# Altium PCB PCB1.PcbDoc
Units mil, origin at the board's own origin, x right, y up, seen from the top; angles counter-clockwise.
Board outline 4450 x 6145 mil, 4 copper layers (Top Layer, GND1, Layer GND2, Bottom Layer), stack 23.756 mil thick; 119 components, 83 nets, 374 pads, 54 vias.
Unrouted connection lines stored in the file: 6.
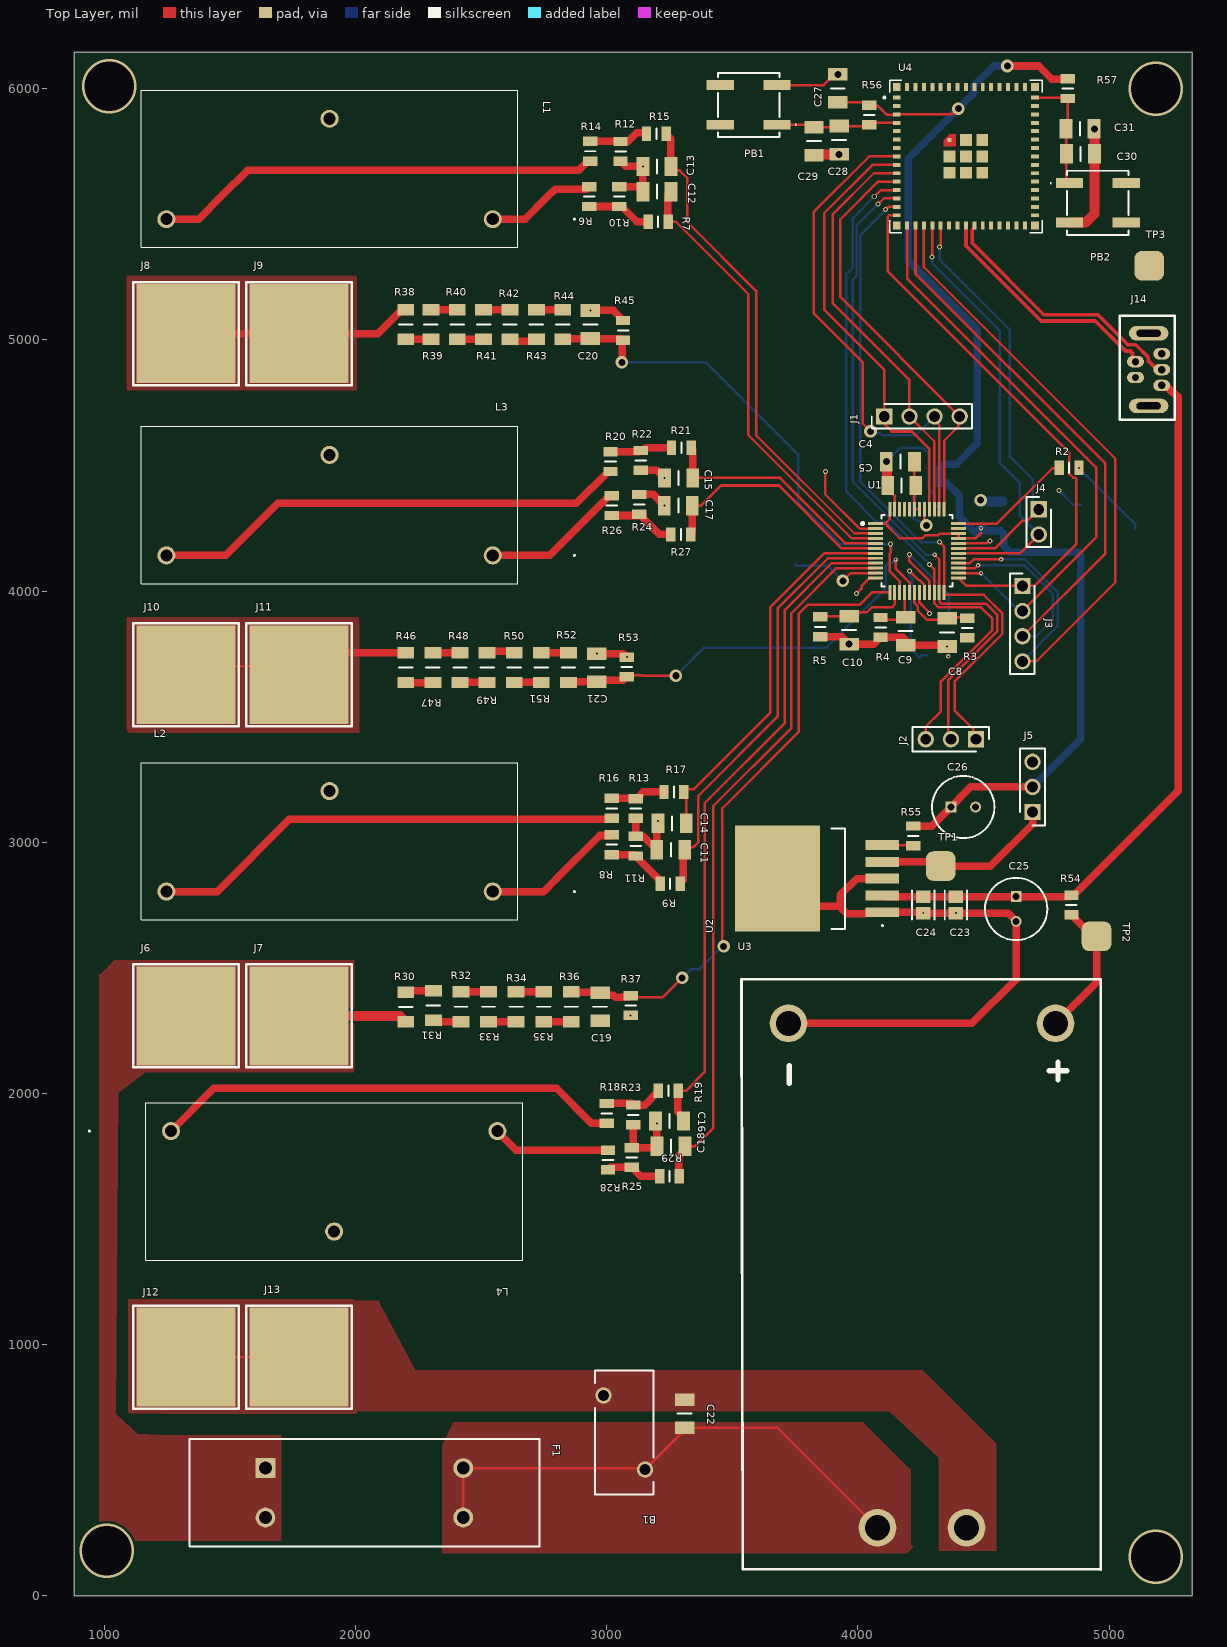
[diagram p0: Top Layer view]
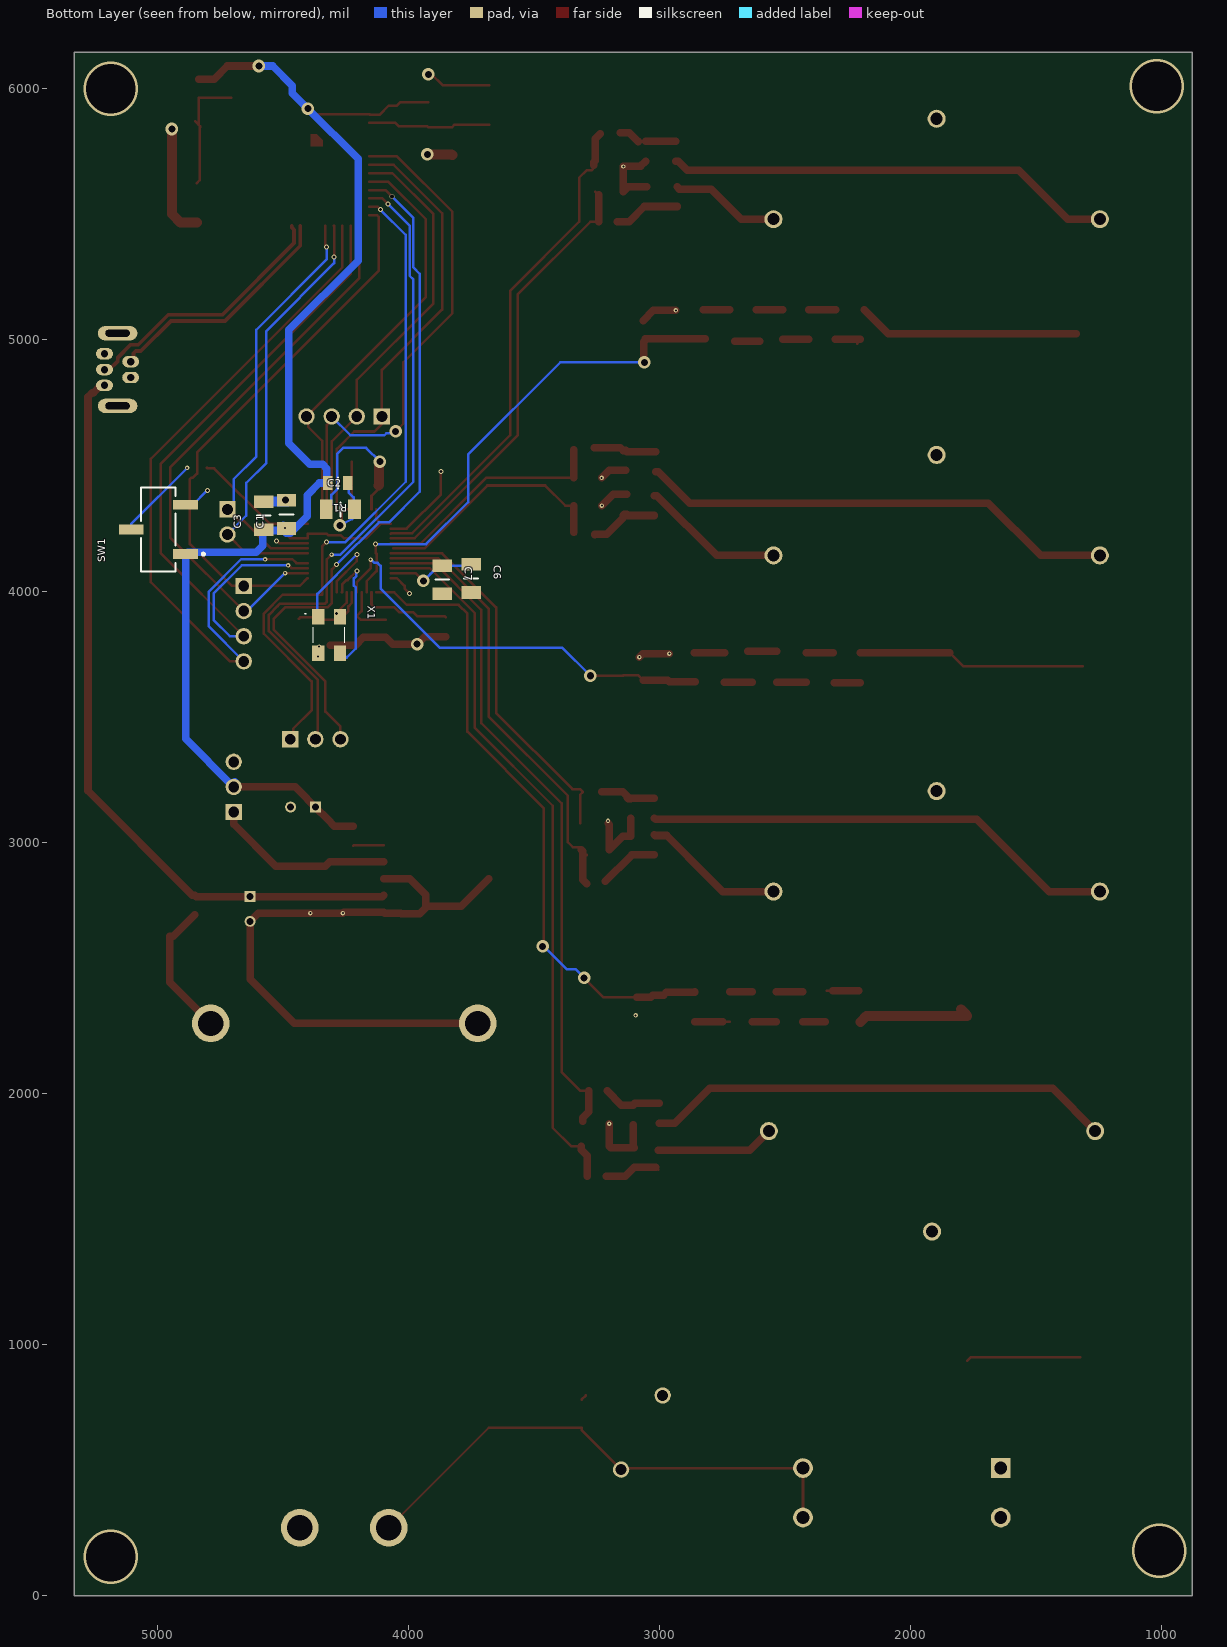
[diagram p1: Bottom Layer view, seen from below]
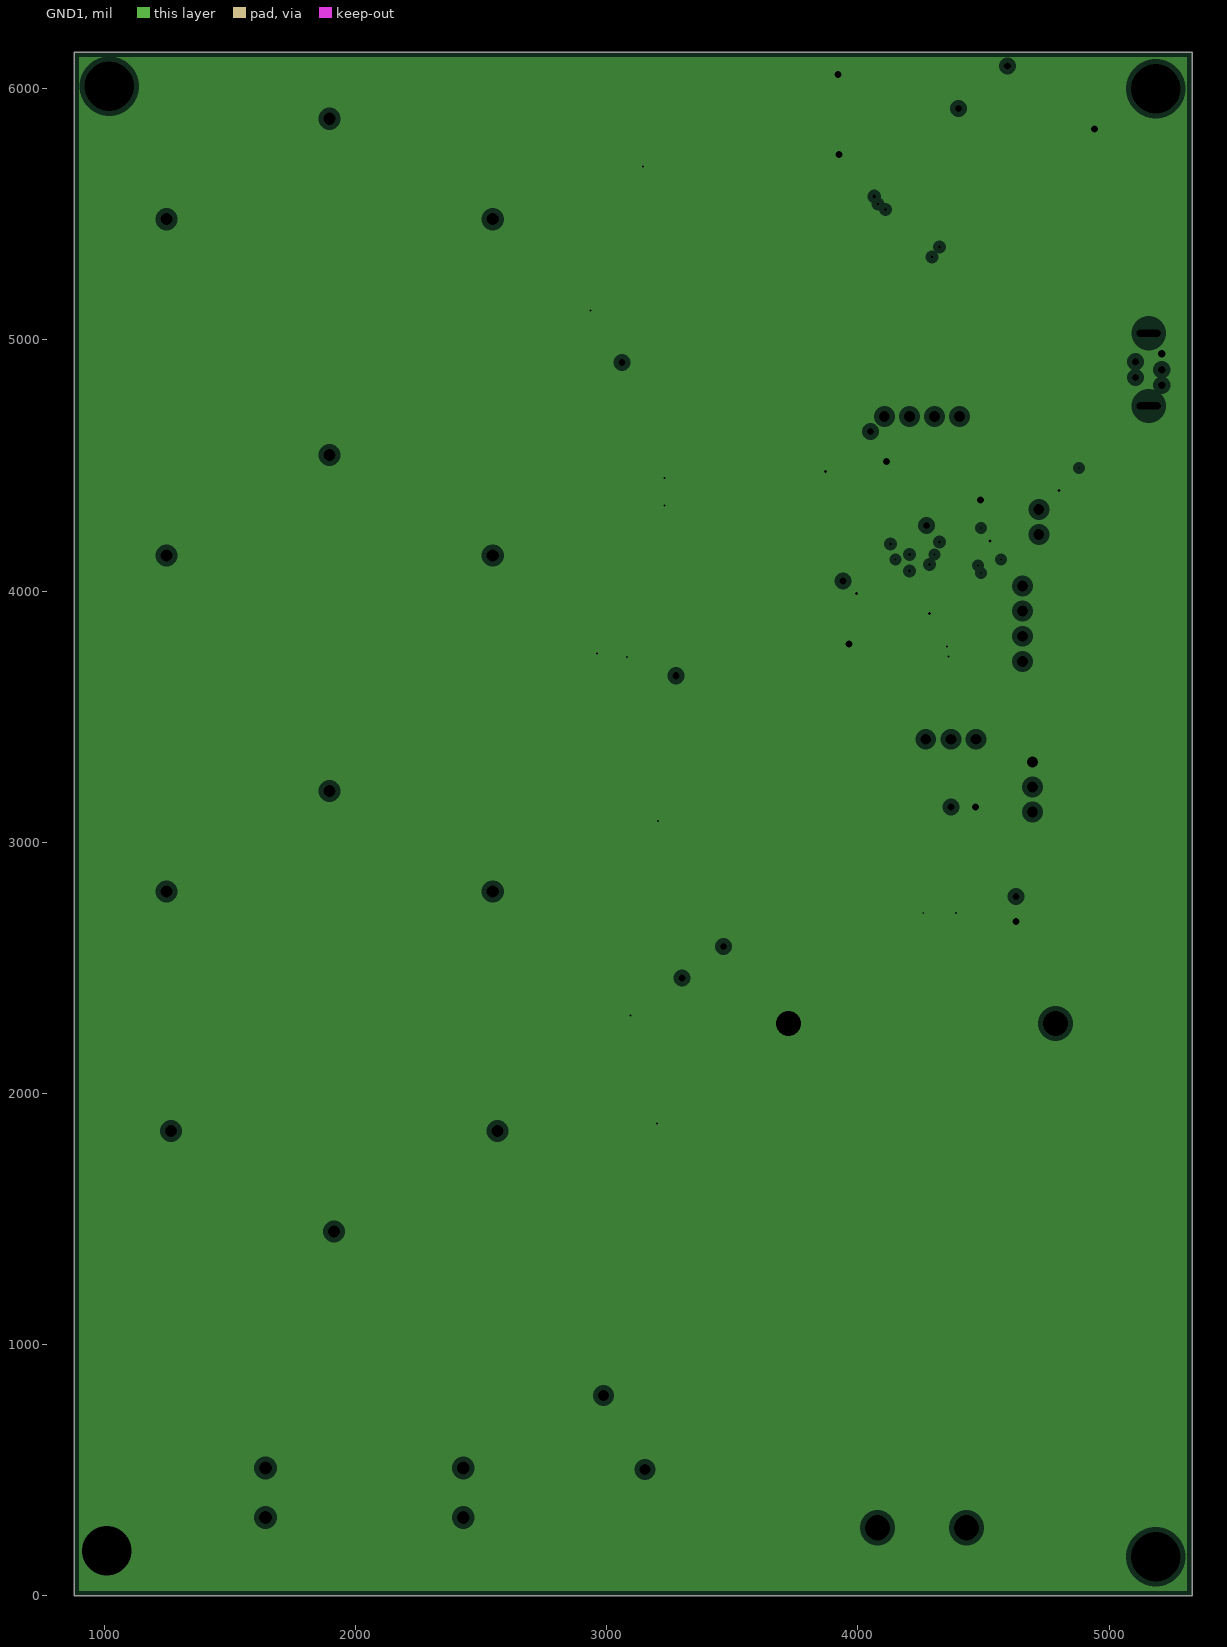
[diagram p2: GND1, clearances drawn from the general rule]
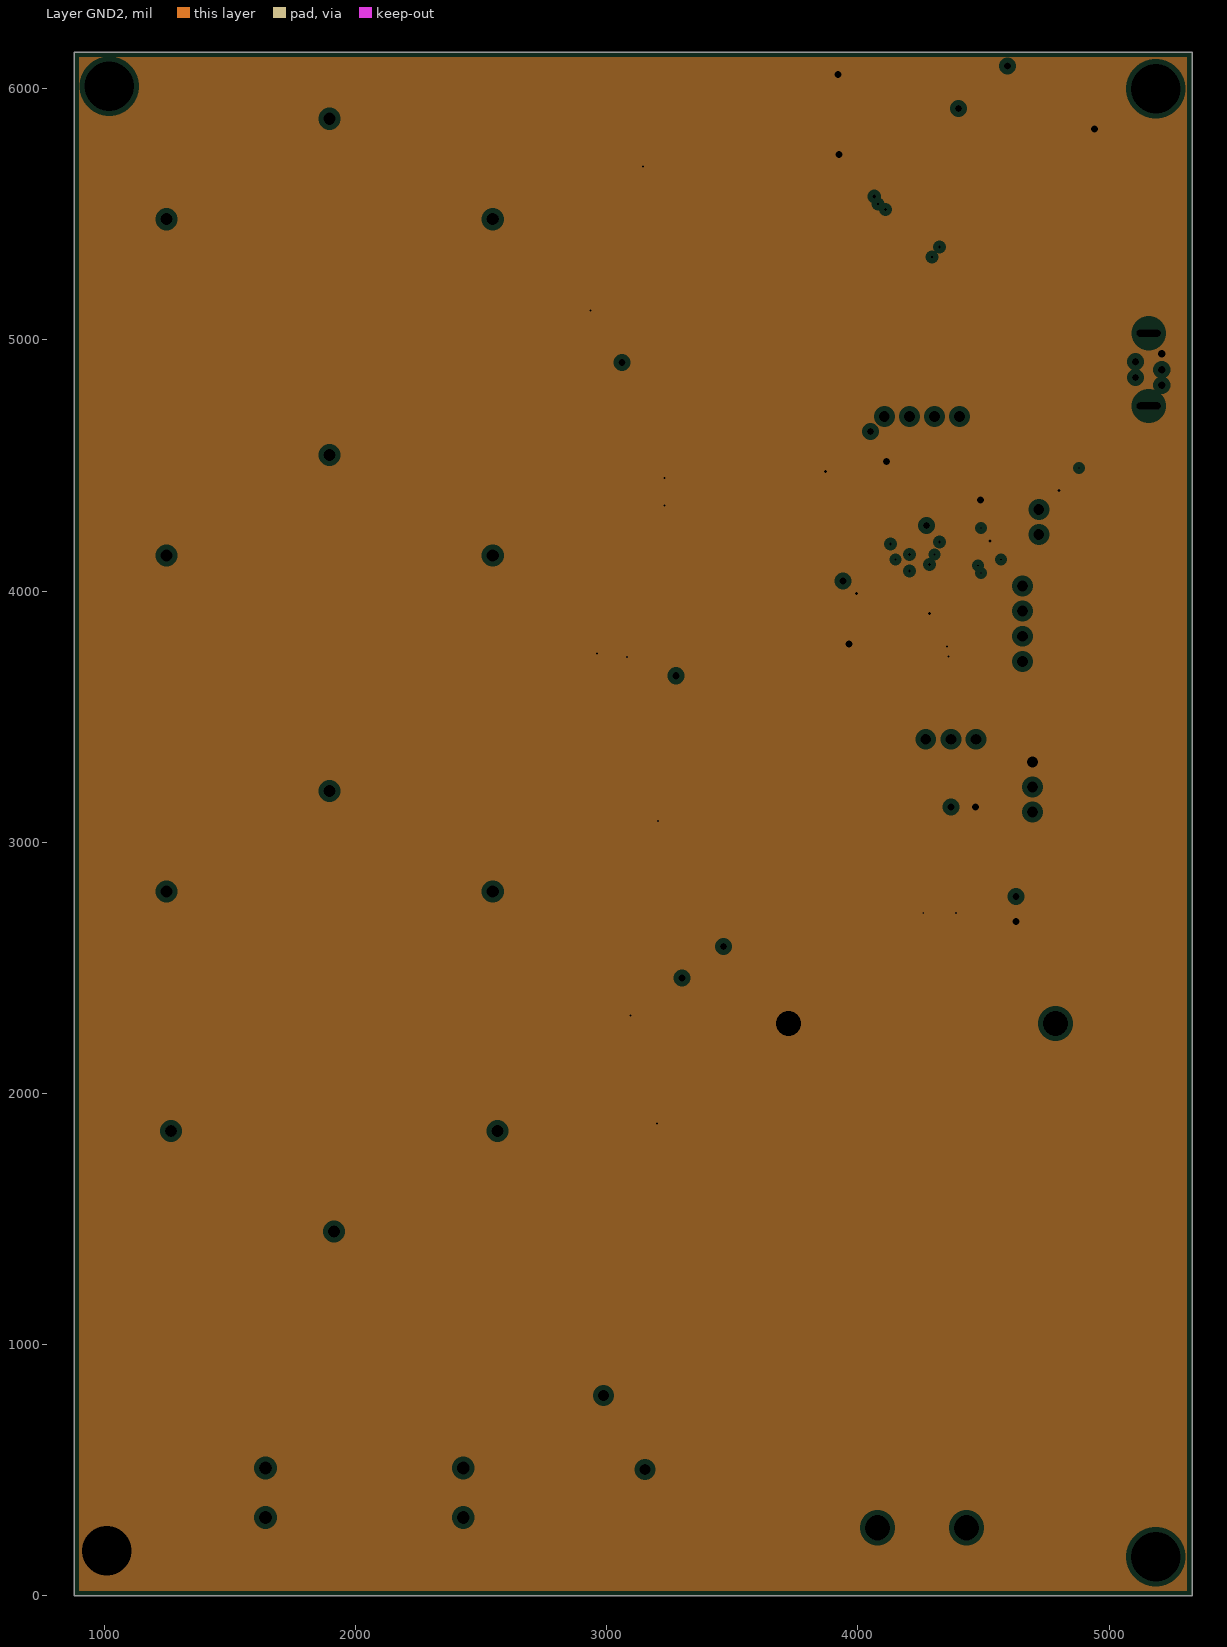
[diagram p3: Layer GND2, clearances drawn from the general rule]
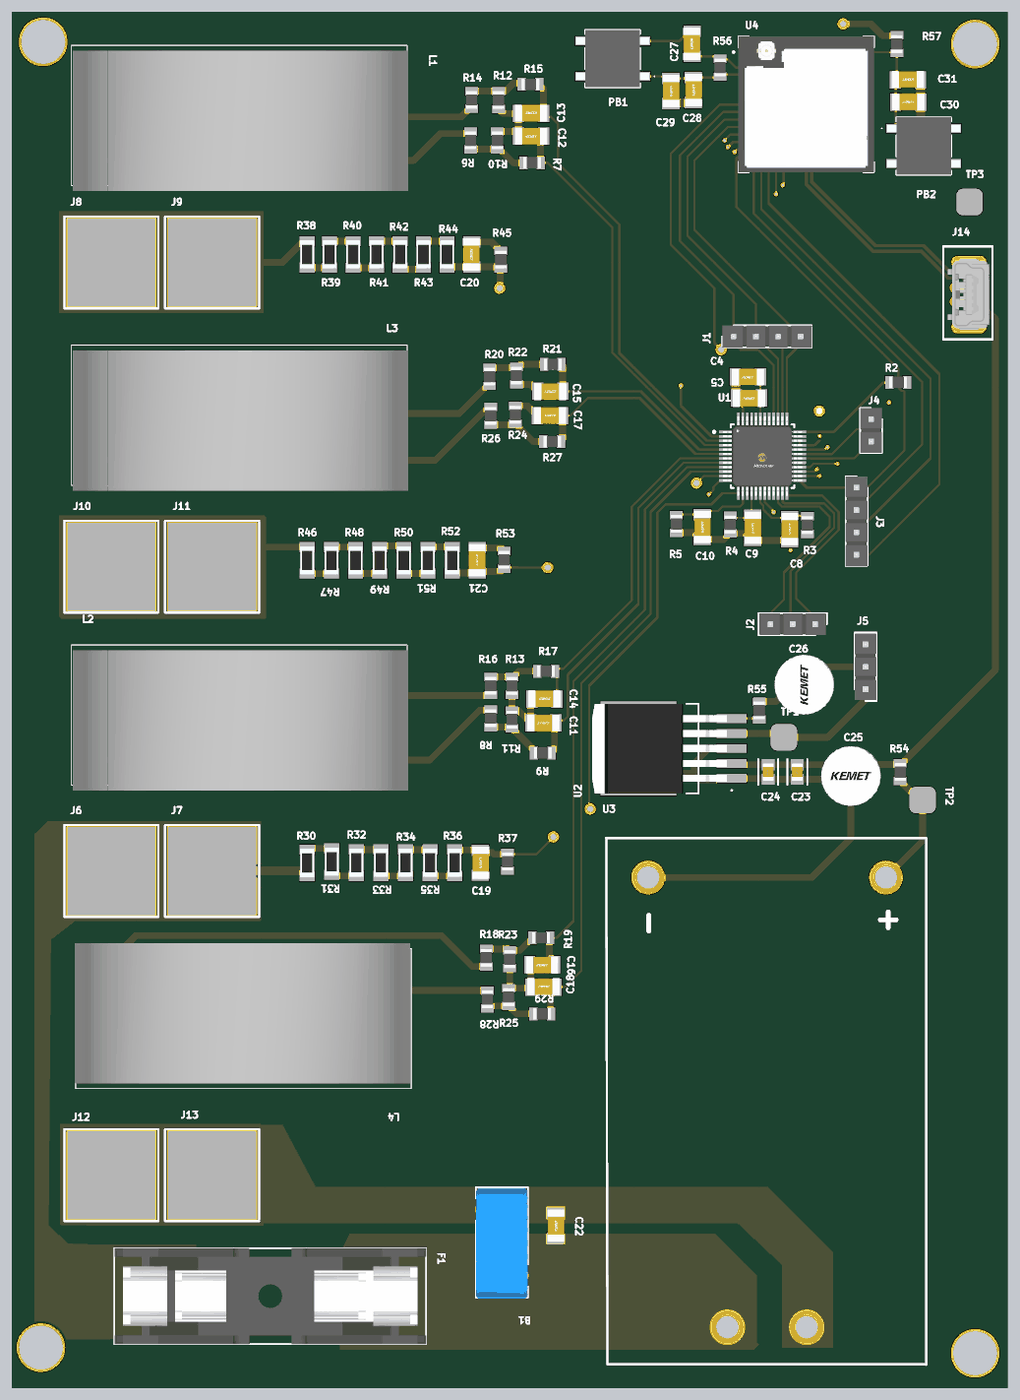
[diagram p4: 3D render of the assembled board from above, using the file's embedded part models]
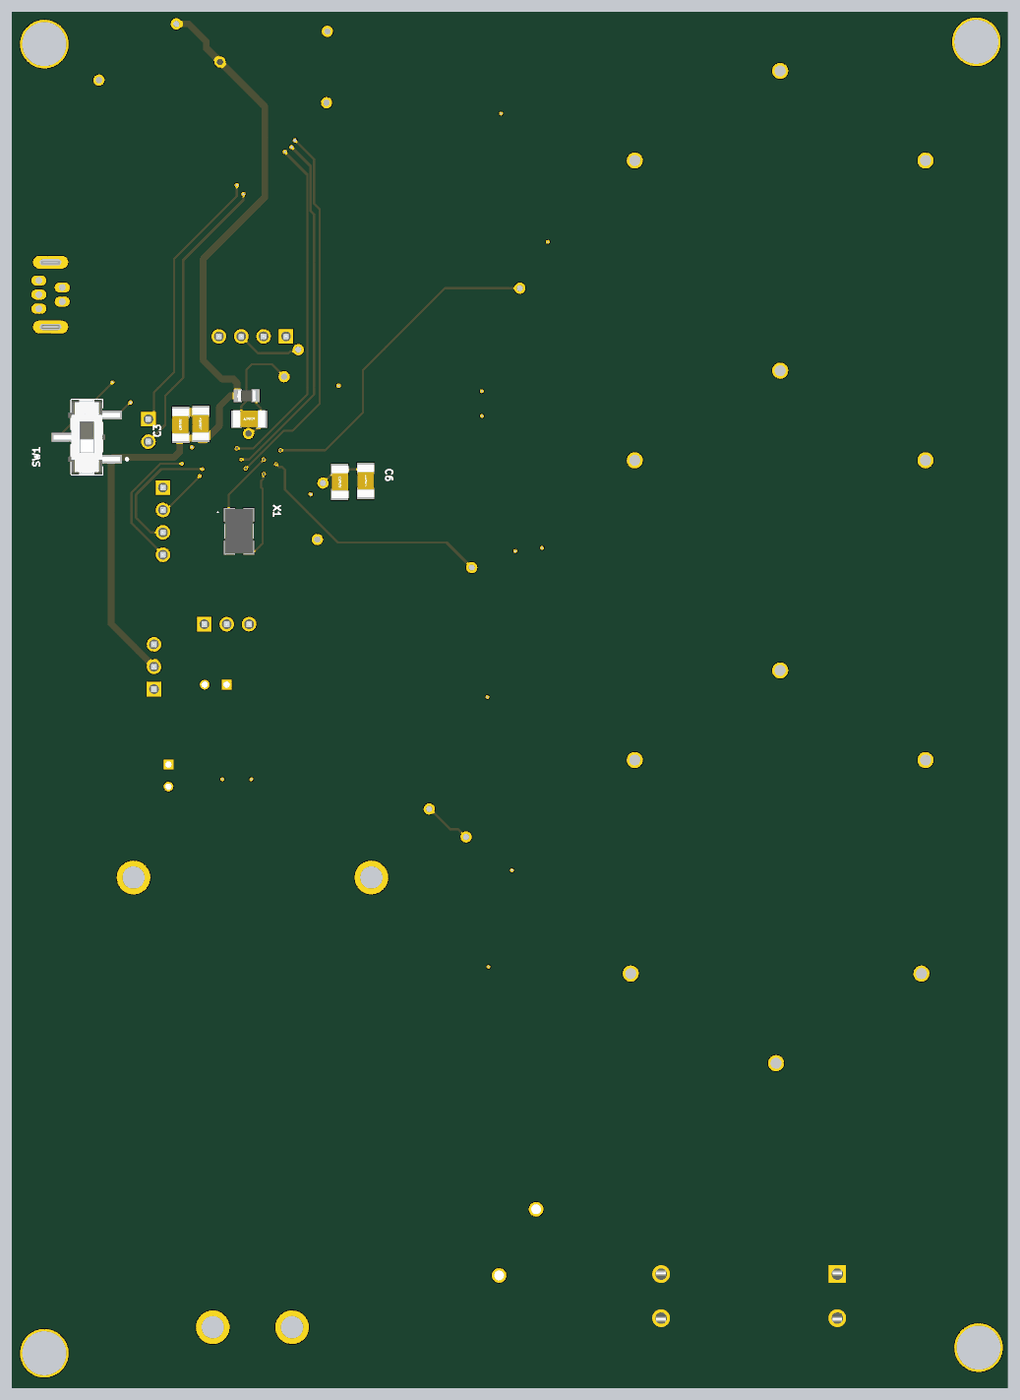
[diagram p5: 3D render of the assembled board from below, using the file's embedded part models]

## Layer stack, top to bottom
Top Solder: solder mask 0.4, Solder Resist, Dk 3.5
Top Layer: signal copper 1.4
Dielectric 2: prepreg 2.8, PP-006, Dk 4.1
GND1: plane copper 1.378, net GND
Dielectric 1: dielectric 12.6, FR-4, Dk 4.8
Layer GND2: plane copper 1.378, net GND
Dielectric 3: prepreg 2.8, PP-006, Dk 4.1
Bottom Layer: signal copper 1.4
Bottom Solder: solder mask 0.4, Solder Resist, Dk 3.5

## Board outline
880,0 5330,0 5330,6145 880,6145

## Design rules (kind name [scope] priority, off if disabled: settings)
Clearance [All] p1: gap=10 ignorepadtopadclearanceinfootprint=FALSE except(0: Arc-Hole Track-Hole SMDPad-Hole THPad-Hole Via-Hole Fill-Hole Poly-Hole Region-Hole Text-Hole; 5: Arc-Arc Arc-Track Arc-SMDPad Track-Track Track-SMDPad SMDPad-SMDPad)
DiffPairsRouting [All] p1: maxlimit=10 minlimit=10 mostfreqgap=10 toplayer_minwidth=15 toplayer_maxwidth=15 toplayer_prefwidth=15 bottomlayer_minwidth=15 bottomlayer_maxwidth=15 bottomlayer_prefwidth=15 maxuncoupledlength=500
Height [All] p1: minheight=0 maxheight=1574.8 prefheight=500
PlaneClearance [All] p1: clearance=20
PlaneConnect [All] p1: planeconnectstyle=Relief reliefexpansion=20 reliefentries=4 reliefconductorwidth=10 reliefairgap=10
PolygonConnect PolygonConnect_8 [All vs IsNamedPolygon('VA_L01_P000')] p1: thpad.connectstyle=Direct thpad.reliefconductorwidth=10 thpad.reliefentries=4 thpad.polygonreliefangle="90 Angle" thpad.airgapwidth=10 smdpad.connectstyle=Direct smdpad.reliefconductorwidth=10 smdpad.reliefentries=4 smdpad.polygonreliefangle="90 Angle" smdpad.airgapwidth=10 via.connectstyle=Relief via.reliefconductorwidth=10 via.reliefentries=4 via.polygonreliefangle="90 Angle" via.airgapwidth=10
PolygonConnect PolygonConnect_7 [All vs IsNamedPolygon('VN_L01_P005')] p2: thpad.connectstyle=Direct thpad.reliefconductorwidth=10 thpad.reliefentries=4 thpad.polygonreliefangle="90 Angle" thpad.airgapwidth=10 smdpad.connectstyle=Direct smdpad.reliefconductorwidth=10 smdpad.reliefentries=4 smdpad.polygonreliefangle="90 Angle" smdpad.airgapwidth=10 via.connectstyle=Relief via.reliefconductorwidth=10 via.reliefentries=4 via.polygonreliefangle="90 Angle" via.airgapwidth=10
PolygonConnect PolygonConnect_6 [All vs IsNamedPolygon('VA_L01_P004')] p3: thpad.connectstyle=Direct thpad.reliefconductorwidth=10 thpad.reliefentries=4 thpad.polygonreliefangle="90 Angle" thpad.airgapwidth=10 smdpad.connectstyle=Direct smdpad.reliefconductorwidth=10 smdpad.reliefentries=4 smdpad.polygonreliefangle="90 Angle" smdpad.airgapwidth=10 via.connectstyle=Relief via.reliefconductorwidth=10 via.reliefentries=4 via.polygonreliefangle="90 Angle" via.airgapwidth=10
PolygonConnect PolygonConnect_5 [All vs IsNamedPolygon('VB_L01_P003')] p4: thpad.connectstyle=Direct thpad.reliefconductorwidth=10 thpad.reliefentries=4 thpad.polygonreliefangle="90 Angle" thpad.airgapwidth=10 smdpad.connectstyle=Direct smdpad.reliefconductorwidth=10 smdpad.reliefentries=4 smdpad.polygonreliefangle="90 Angle" smdpad.airgapwidth=10 via.connectstyle=Relief via.reliefconductorwidth=10 via.reliefentries=4 via.polygonreliefangle="90 Angle" via.airgapwidth=10
PolygonConnect PolygonConnect_4 [All vs IsNamedPolygon('VC_L01_P002')] p5: thpad.connectstyle=Direct thpad.reliefconductorwidth=10 thpad.reliefentries=4 thpad.polygonreliefangle="90 Angle" thpad.airgapwidth=10 smdpad.connectstyle=Direct smdpad.reliefconductorwidth=10 smdpad.reliefentries=4 smdpad.polygonreliefangle="90 Angle" smdpad.airgapwidth=10 via.connectstyle=Relief via.reliefconductorwidth=10 via.reliefentries=4 via.polygonreliefangle="90 Angle" via.airgapwidth=10
PolygonConnect PolygonConnect_3 [All vs IsNamedPolygon('VN_L01_P001')] p6: thpad.connectstyle=Direct thpad.reliefconductorwidth=10 thpad.reliefentries=4 thpad.polygonreliefangle="90 Angle" thpad.airgapwidth=10 smdpad.connectstyle=Direct smdpad.reliefconductorwidth=10 smdpad.reliefentries=4 smdpad.polygonreliefangle="90 Angle" smdpad.airgapwidth=10 via.connectstyle=Relief via.reliefconductorwidth=10 via.reliefentries=4 via.polygonreliefangle="90 Angle" via.airgapwidth=10
PolygonConnect PolygonConnect_2 [All vs IsNamedPolygon('NETB1_2_L01_P006')] p7: thpad.connectstyle=Direct thpad.reliefconductorwidth=10 thpad.reliefentries=4 thpad.polygonreliefangle="90 Angle" thpad.airgapwidth=10 smdpad.connectstyle=Direct smdpad.reliefconductorwidth=10 smdpad.reliefentries=4 smdpad.polygonreliefangle="90 Angle" smdpad.airgapwidth=10 via.connectstyle=Relief via.reliefconductorwidth=10 via.reliefentries=4 via.polygonreliefangle="90 Angle" via.airgapwidth=10
PolygonConnect PolygonConnect_1 [All vs IsNamedPolygon('NETB1_2_L01_P006')] p8: thpad.connectstyle=Direct thpad.reliefconductorwidth=10 thpad.reliefentries=4 thpad.polygonreliefangle="90 Angle" thpad.airgapwidth=10 smdpad.connectstyle=Direct smdpad.reliefconductorwidth=10 smdpad.reliefentries=4 smdpad.polygonreliefangle="90 Angle" smdpad.airgapwidth=10 via.connectstyle=Relief via.reliefconductorwidth=10 via.reliefentries=4 via.polygonreliefangle="90 Angle" via.airgapwidth=10
PolygonConnect [All] p9: connectstyle=Relief reliefconductorwidth=10 reliefentries=4 polygonreliefangle="90 Angle" airgapwidth=10
RoutingVias [All] p1: holewidth=28 width=50 viastyle="Through Hole" minholewidth=28 minwidth=50 maxholewidth=28 maxwidth=50
SolderMaskExpansion [All] p1: expansion=4 istentingtop=FALSE
Width [All] p1: maxlimit=40 minlimit=10 preferedwidth=10
26 further rules are at their usual default settings.

## Classes and differential pairs
component class VoltageSensorInput: C19 C20 C21 R30 R31 R32 R33 R34 R35 R36 R37 R38 R39 R40 R41 R42 R43 R44 R45 R46 R47 R48 R49 R50 R51 R52 R53
component class VoltageIn: J6 J7 J8 J9 J10 J11 J12 J13
component class PowerSupply: B1 C22 C23 C24 C25 C26 F1 J5 R54 R55 TP1 TP2 TP3 U2 U3
component class MeteringIC: C1 C2 C3 C4 C5 C6 C7 C8 C9 C10 J1 J2 J3 J4 R1 R2 R3 R4 R5 SW1 U1 X1
component class MCU: C27 C28 C29 C30 C31 J14 PB1 PB2 R56 R57 U4
component class CurrentSensorInput: C11 C12 C13 C14 C15 C16 C17 C18 L1 L2 L3 L4 R6 R7 R8 R9 R10 R11 R12 R13 R14 R15 R16 R17 R18 R19 R20 R21 R22 R23 R24 R25 R26 R27 R28 R29
differential pair USB: +USB_P -USB_N

## Components (designator, comment, footprint, x,y, rotation, side; value= is the part's Value field where it differs from the comment)
B1 "MOV-10D561K" MOV10D561K 3070,650 r270 top
C1 "C1206C104J1RACAUTO" CAPC3316X180N 4485,4305 r90 bottom
C2 "C1206C104J1RACAUTO" CAPC3316X180N 4270,4325 r180 bottom
C3 "MBAST31LAB7106KTNA01" CAPC3316X180N 4575,4300 r90 bottom
C4 "C1206C104J1RACAUTO" CAPC3316X180N 4169.09,4515 r180 top
C5 "MBAST31LAB7106KTNA01" CAPC3316X180N 4174.09,4420 r180 top
C6 "C1206C104J1RACAUTO" CAPC3316X180N 3750,4050 r270 bottom
C7 "MBAST31LAB7106KTNA01" CAPC3316X180N 3865,4045 r270 bottom
C8 "C1206C183J5RACTU" CAPC3316X180N 4355,3835 r270 top
C9 "C1206C183J5RACTU" CAPC3316X180N 4190,3840 r270 top
C10 "C1206C183J5RACTU" CAPC3316X180N 3965,3844.09 r270 top
C11 "C1206C183J5RACTU" CAPC3316X180N 3255,2970 r180 top
C12 "C1206C183J5RACTU" CAPC3316X180N 3200,5590 r180 top
C13 "C1206C183J5RACTU" CAPC3316X180N 3200,5690 r0 top
C14 "C1206C183J5RACTU" CAPC3316X180N 3260,3075 r0 top
C15 "C1206C183J5RACTU" CAPC3316X180N 3285.91,4450 r180 top
C16 "C1206C183J5RACTU" CAPC3316X180N 3250,1890 r180 top
C17 "C1206C183J5RACTU" CAPC3316X180N 3285,4340 r0 top
C18 "C1206C183J5RACTU" CAPC3316X180N 3255.91,1790 r0 top
C19 "C1206C183J5RACTU" CAPC3316X180N 2973.83,2345 r270 top
C20 "C1206C183J5RACTU" CAPC3316X180N 2935,5060.94 r90 top
C21 "C1206C183J5RACTU" CAPC3316X180N 2960.7,3695 r90 top
C22 "C1206X224KARACAUTO" CAPC3316X180N 3310,725 r270 top
C23 "GRM21BC71E106KE01L" FP-GRM21B-0_2-e0_2_0_7-IPC_B 4390,2750 r90 top
C24 "GRM21BC71E106KE01L" FP-GRM21B-0_2-e0_2_0_7-IPC_B 4260,2750 r90 top
C25 "ESC107M035AE3AA" CAPPRD250W50D630H1250 4630,2783.43 r270 top
C26 "ESC107M035AE3AA" CAPPRD250W50D630H1250 4370,3140 r0 top
C27 "C1206C104J1RACAUTO" CAPC3316X180N 3920,6000.91 r90 top
C28 "C1206C104J1RACAUTO" CAPC3316X180N 3925,5795 r270 top
C29 "MBAST31LAB7106KTNA01" CAPC3316X180N 3825,5790.91 r270 top
C30 "C1206C104J1RACAUTO" CAPC3316X180N 4885.91,5740 r0 top
C31 "MBAST31LAB7106KTNA01" CAPC3316X180N 4884.09,5840 r0 top
F1 "0031.8231" FP-0031_8231-MFG 2035,410 r0 top
J1 "HTSW-104-07-G-S" HDRV4W64P0X254_1X4_1016X248X838P 4105,4695 r180 top
J2 "HTSW-103-07-G-S" HDRV3W64P0X254_1X3_749X249X858P 4470,3410 r180 top
J3 "HTSW-104-07-G-S" HDRV4W64P0X254_1X4_1016X248X838P 4655,4020 r90 top
J4 "HTSW-102-07-G-S" HDRV2W64P0X254_1X2_508X248X838P 4720,4325 r90 top
J5 "HTSW-103-07-G-S" HDRV3W64P0X254_1X3_749X249X858P 4695,3120 r90 top
J6 "WireConnector" WIRECONNECTOR 1325,2308.33 r0 top
J7 "WireConnector" WIRECONNECTOR 1775,2308.33 r0 top
J8 "WireConnector" WIRECONNECTOR 1325,5025 r0 top
J9 "WireConnector" WIRECONNECTOR 1775,5025 r0 top
J10 "WireConnector" WIRECONNECTOR 1325,3666.67 r0 top
J11 "WireConnector" WIRECONNECTOR 1775,3666.67 r0 top
J12 "WireConnector" WIRECONNECTOR 1325,950 r0 top
J13 "WireConnector" WIRECONNECTOR 1775,950 r0 top
J14 "500075-1517" miniUSB 5157.17,4881.5 r90 top
L1 "CT07-1000" AC1060 2546.26,5480 r0 top locked
L2 "CT07-1000" AC1060 2546.26,2803.49 r0 top locked
L3 "CT07-1000" AC1060 2546.26,4141.75 r0 top locked
L4 "CT07-1000" AC1060 1265.39,1850 r180 top locked
PB1 "EVP-BV2C3L000" EVPBV2C3L000 3565,5935 r0 top
PB2 "EVP-BV2C3L000" EVPBV2C3L000 4955,5545 r180 top
R1 "CRCW201010K0JNEFIF" RESC2013X84N 4280.63,4430 r0 bottom
R2 "CRCW201010K0JNEFIF" RESC2013X84N 4840.63,4490 r180 top
R3 "ERA-6AED102V" RESC2013X84N 4435,3852.6 r270 top
R4 "ERA-6AED102V" RESC2013X84N 4090,3855 r270 top
R5 "ERA-6AED102V" RESC2013X84N 3850,3857.6 r270 top
R6 "WSL080500000ZEA9" RESC2013X84N 2930,5570 r90 top
R7 "ERA-6AED102V" RESC2013X84N 3205,5470 r180 top
R8 "WSL080500000ZEA9" RESC2013X84N 3020,2990 r90 top
R9 "ERA-6AED102V" RESC2013X84N 3252.6,2835 r180 top
R10 "CRCW08052K40FKEAHP" RESC2013X84N 3050,5570 r90 top
R11 "CRCW08052K40FKEAHP" RESC2013X84N 3115,2984.37 r90 top
R12 "CRCW08052K40FKEAHP" RESC2013X84N 3055,5750 r90 top
R13 "CRCW08052K40FKEAHP" RESC2013X84N 3115,3134.37 r90 top
R14 "WSL080500000ZEA9" RESC2013X84N 2935,5750.63 r270 top
R15 "ERA-6AED102V" RESC2013X84N 3197.6,5820 r180 top
R16 "WSL080500000ZEA9" RESC2013X84N 3020,3135 r270 top
R17 "ERA-6AED102V" RESC2013X84N 3267.4,3200 r180 top
R18 "WSL080500000ZEA9" RESC2013X84N 3000,1920.63 r270 top
R19 "ERA-6AED102V" RESC2013X84N 3245,2010 r0 top
R20 "WSL080500000ZEA9" RESC2013X84N 3015,4515 r270 top
R21 "ERA-6AED102V" RESC2013X84N 3297.4,4570 r180 top
R22 "CRCW08052K40FKEAHP" RESC2013X84N 3135,4520 r270 top
R23 "CRCW08052K40FKEAHP" RESC2013X84N 3105,1914.37 r270 top
R24 "CRCW08052K40FKEAHP" RESC2013X84N 3130,4345 r270 top
R25 "CRCW08052K40FKEAHP" RESC2013X84N 3100,1745 r270 top
R26 "WSL080500000ZEA9" RESC2013X84N 3020,4340 r90 top
R27 "ERA-6AED102V" RESC2013X84N 3295,4225 r180 top
R28 "WSL080500000ZEA9" RESC2013X84N 3005,1735 r90 top
R29 "ERA-6AED102V" RESC2013X84N 3250,1670 r0 top
R30 "ERA-8AEB244V" RESC3216X70N 2200,2344.06 r270 top
R31 "ERA-8AEB244V" RESC3216X70N 2309.82,2350 r90 top
R32 "ERA-8AEB244V" RESC3216X70N 2419.63,2345 r270 top
R33 "ERA-8AEB244V" RESC3216X70N 2529.45,2345 r90 top
R34 "ERA-8AEB244V" RESC3216X70N 2639.26,2345 r270 top
R35 "ERA-8AEB244V" RESC3216X70N 2749.08,2345 r90 top
R36 "ERA-8AEB244V" RESC3216X70N 2858.9,2345 r270 top
R37 "ERA-6AED102V" RESC2013X84N 3095,2350 r270 top
R38 "ERA-8AEB244V" RESC3216X70N 2200,5060.94 r90 top
R39 "ERA-8AEB244V" RESC3216X70N 2299.98,5060.94 r270 top
R40 "ERA-8AEB244V" RESC3216X70N 2404.97,5060.94 r90 top
R41 "ERA-8AEB244V" RESC3216X70N 2509.95,5060.94 r270 top
R42 "ERA-8AEB244V" RESC3216X70N 2614.93,5060.94 r90 top
R43 "ERA-8AEB244V" RESC3216X70N 2719.92,5060.94 r270 top
R44 "ERA-8AEB244V" RESC3216X70N 2824.9,5060.94 r90 top
R45 "ERA-6AED102V" RESC2013X84N 3065,5037.4 r90 top
R46 "ERA-8AEB244V" RESC3216X70N 2200,3695 r90 top
R47 "ERA-8AEB244V" RESC3216X70N 2307.94,3695 r270 top
R48 "ERA-8AEB244V" RESC3216X70N 2415.88,3695 r90 top
R49 "ERA-8AEB244V" RESC3216X70N 2523.82,3695 r270 top
R50 "ERA-8AEB244V" RESC3216X70N 2631.76,3695 r90 top
R51 "ERA-8AEB244V" RESC3216X70N 2739.7,3695 r270 top
R52 "ERA-8AEB244V" RESC3216X70N 2847.65,3695 r90 top
R53 "ERA-6AED102V" RESC2013X84N 3080,3697.4 r90 top
R54 "WSL080500000ZEA9" RESC2013X84N 4850,2750 r270 top
R55 "CRCW201010K0JNEFIF" RESC2013X84N 4220,3025 r270 top
R56 "ERA-6AED102V" RESC2013X84N 4045,5895 r270 top
R57 "ERA-6AED102V" RESC2013X84N 4835,6000 r270 top
SW1 "JS102011SCQN" FP-JS102011SCQN-MFG 4995,4245 r90 bottom
TP1 "Testpoint" TESTPAD 4330,2905 r90 top
TP2 "Testpoint" TESTPAD 4950,2625 r90 top
TP3 "Testpoint" TESTPAD 5160,5295 r0 top
U1 "ATM90E36A-AU-Y" FP-ATM90E36A-AU-Y-MFG 4235,4160 r0 top
U2 "TPS75933KTTR" TPS75933KTTR 3773.46,2855 r90 top
U3 "Hi-link" HI-LINK 4255,1275 r90 top
U4 "ESP32-S3-MINI-1U-N8" XCVR_ESP32-S3-MINI-1U-N8 4429.96,5730.04 r0 top
X1 "ECS-163.84-10-30B-CKM-TR" ECS163841030BCKMTR 4315,3825 r270 bottom

## Footprints (in the part's own frame and the unit in brackets; to place one, negate y for a bottom-side part, rotate by r counter-clockwise, add the part's x,y. Pads: shape width x height; smd on the part's side, far side on the other; paste and mask are expansions set on the pad)
AC1060 [mm]
  round 1.824 hole 1.216: 1(0,0) 2(-16.5,10.16) 3(-33,0)
  silkscreen extent -35.55,-2.85 8.3,13.05, body extent -35.43,-3.45 2.67,12.45, height 38.09
CAPC3316X180N [mm]
  rect 1.28x1.96 smd: 1(-1.42,0) 2(1.42,0)
  silkscreen extent 0,-0.7 0,0.7, body extent -1.85,-0.93 1.85,1.02, height 1.77
CAPPRD250W50D630H1250 [mm]
  rect 1.1x1.1 / inner round 1.1 / far side rect 1.1x1.1 hole 0.7: 1(0,0)
  round 1.1 hole 0.7: 2(2.5,0)
  silkscreen extent -1.9,-3.15 4.4,3.15, body extent -2.09,-3.41 4.7,3.41, height 12.62
ECS163841030BCKMTR [mm]
  rect 1.6x1.25 smd: 1(-1.85,-1.1) 2(1.85,-1.1) 3(1.85,1.1) 4(-1.85,1.1)
  silkscreen extent -2.2,-2.45 0.8,1.6, body extent -2.52,-1.6 2.52,1.6, height 0.95
EVPBV2C3L000 [mm]
  rect 2.75x1 smd: A1(2.875,-2) A2(-2.875,-2) B1(2.875,2) B2(-2.875,2)
  silkscreen extent -3.1,-3.25 4.8,3.25, body extent -4.15,-3.25 4.15,3.25, height 4.6
FP-0031_8231-MFG [mm]
  round 2 hole 1.3 paste-2539.97 mask+0: 1(-10,-2.5) 2(10,-2.5) 2(10,2.5)
  rect 2x2 hole 1.3 paste-2539.97 mask+0: 1(-10,2.5)
  silkscreen extent -17.7,-5.45 17.7,5.45, body extent -17.8,-5.55 17.8,5.55, height 0.25
FP-ATM90E36A-AU-Y-MFG [mm]
  rect 1.5x0.3 smd paste+0 mask+0: 1(-4.2,2.75) 2(-4.2,2.25) 3(-4.2,1.75) 4(-4.2,1.25) 5(-4.2,0.75) 6(-4.2,0.25) 7(-4.2,-0.25) 8(-4.2,-0.75) 9(-4.2,-1.25) 10(-4.2,-1.75) 11(-4.2,-2.25) 12(-4.2,-2.75) 25(4.2,-2.75) 26(4.2,-2.25) 27(4.2,-1.75) 28(4.2,-1.25) 29(4.2,-0.75) 30(4.2,-0.25) 31(4.2,0.25) 32(4.2,0.75) 33(4.2,1.25) 34(4.2,1.75) 35(4.2,2.25) 36(4.2,2.75)
  rect 0.3x1.5 smd paste+0 mask+0: 13(-2.75,-4.2) 14(-2.25,-4.2) 15(-1.75,-4.2) 16(-1.25,-4.2) 17(-0.75,-4.2) 18(-0.25,-4.2) 19(0.25,-4.2) 20(0.75,-4.2) 21(1.25,-4.2) 22(1.75,-4.2) 23(2.25,-4.2) 24(2.75,-4.2) 37(2.75,4.2) 38(2.25,4.2) 39(1.75,4.2) 40(1.25,4.2) 41(0.75,4.2) 42(0.25,4.2) 43(-0.25,4.2) 44(-0.75,4.2) 45(-1.25,4.2) 46(-1.75,4.2) 47(-2.25,4.2) 48(-2.75,4.2)
  silkscreen extent -5.62,-3.6 3.6,3.6, body extent -4.5,-4.5 4.5,4.5, height 1.2
FP-GRM21B-0_2-e0_2_0_7-IPC_B [mil]
  rect 49.4x57.33 smd paste+0 mask+0: 1(-32.51,0) 2(32.51,0)
  silkscreen extent -57,-44 57,44, body extent -67,-39 67,39, height 10
FP-JS102011SCQN-MFG [mm]
  rect 1x2.5 smd paste+0 mask+0: 1(-2.5,-2.75) 2(0,2.75) 3(2.5,-2.75)
  silkscreen extent -4.25,-4.67 4.25,1.75, body extent -4.25,-3.75 4.25,3.75, height 5.5
HDRV2W64P0X254_1X2_508X248X838P [mm]
  rect 1.65x1.65 / inner round 1.65 / far side rect 1.65x1.65 hole 1.1: 1(0,0)
  round 1.65 hole 1.1: 2(-2.54,0)
  silkscreen extent -3.81,-1.24 1.27,1.24, body extent -3.81,-1.24 1.27,1.24, height 8.38
HDRV3W64P0X254_1X3_749X249X858P [mm]
  rect 1.65x1.65 / inner round 1.65 / far side rect 1.65x1.65 hole 1.1: 1(0,0)
  round 1.65 hole 1.1: 2(2.54,0) 3(5.08,0)
  silkscreen extent -1.33,-1.24 6.41,1.25, body extent -1.21,-1.24 6.29,1.24, height 8.58
HDRV4W64P0X254_1X4_1016X248X838P [mm]
  rect 1.65x1.65 / inner round 1.65 / far side rect 1.65x1.65 hole 1.1: 1(0,0)
  round 1.65 hole 1.1: 2(-2.54,0) 3(-5.08,0) 4(-7.62,0)
  silkscreen extent -8.89,-1.24 1.27,1.24, body extent -8.89,-1.24 1.27,1.24, height 8.38
HI-LINK [mm]
  round 3.81 hole 2.54 paste-2539.97: 1(-25.5,4.5) 2(-25.5,-4.5) 3(25.5,13.5) 4(25.5,-13.5)
  silkscreen extent -29.76,-18.07 29.97,18.29, body extent -28.57,-17.65 29.21,17.15, height 20
miniUSB [mm]
  oval 1.15x1.71 hole 0.75: 1(-1.6,-1.325) 2(0.8,1.325) 3(0,-1.325) 4(-0.8,1.325) 5(1.6,-1.325)
  oval 1.45x4 hole 0.7 slot 2.45 at 90 deg unplated: 10(-3.675,0) 11(3.675,0)
  silkscreen extent -5.08,-2.67 5.46,2.92, body extent -3.85,-2.3 3.85,2.4, height 9
MOV10D561K [mm]
  round 1.65 hole 1.1: 1(-3.75,-2.1) 2(3.75,2.1)
  silkscreen extent -6.25,-2.95 6.25,2.95, body extent -6.12,-2.95 6.38,2.95, height 16.25
RESC2013X84N [mm]
  rect 0.95x1.45 smd: 1(-1,0) 2(1,0)
  silkscreen extent 0,-0.53 0,0.54, body extent -1.01,-0.64 1.01,0.64, height 0.29
RESC3216X70N [mm]
  rect 1.15x1.7 smd: 1(-1.5,0) 2(1.5,0)
  silkscreen extent 0,-0.67 0,0.67, body extent -1.6,-0.8 1.6,0.8, height 0.6
TESTPAD [mm]
  rrect50% 3x3 smd: 1(0,0)
TPS75933KTTR [mm]
  rect 1x3.4 smd: 1(-3.4,-8.226) 2(-1.7,-8.226) 3(0,-8.226) 4(1.7,-8.226) 5(3.4,-8.226)
  rect 10.7x8.6 smd: 6(0,2.374)
  silkscreen extent -5.08,-8.28 5.08,-3.08, body extent -5.08,-7.65 5.08,7.62, height 4.44
WIRECONNECTOR [mm]
  rect 10x10 smd: 1(0,0)
  silkscreen extent -5.33,-5.21 5.33,5.21
XCVR_ESP32-S3-MINI-1U-N8 [mm]
  rect 0.8x0.4 smd: 1(-7,5.95) 2(-7,5.1) 3(-7,4.25) 4(-7,3.4) 5(-7,2.55) 6(-7,1.7) 7(-7,0.85) 8(-7,0) 9(-7,-0.85) 10(-7,-1.7) 11(-7,-2.55) 12(-7,-3.4) 13(-7,-4.25) 14(-7,-5.1) 15(-7,-5.95) 31(7,-5.95) 32(7,-5.1) 33(7,-4.25) 34(7,-3.4) 35(7,-2.55) 36(7,-1.7) 37(7,-0.85) 38(7,0) 39(7,0.85) 40(7,1.7) 41(7,2.55) 42(7,3.4) 43(7,4.25) 44(7,5.1) 45(7,5.95)
  rect 0.4x0.8 smd: 16(-5.95,-7) 17(-5.1,-7) 18(-4.25,-7) 19(-3.4,-7) 20(-2.55,-7) 21(-1.7,-7) 22(-0.85,-7) 23(0,-7) 24(0.85,-7) 25(1.7,-7) 26(2.55,-7) 27(3.4,-7) 28(4.25,-7) 29(5.1,-7) 30(5.95,-7) 46(5.95,7) 47(5.1,7) 48(4.25,7) 49(3.4,7) 50(2.55,7) 51(1.7,7) 52(0.85,7) 53(0,7) 54(-0.85,7) 55(-1.7,7) 56(-2.55,7) 57(-3.4,7) 58(-4.25,7) 59(-5.1,7) 60(-5.95,7)
  rect 0.4x0.4 smd paste-1 mask+0: 61_1(-1.65,1.65)
  rect 1.2x1.2 smd: 61_2(0,1.65) 61_3(1.65,1.65) 61_4(-1.65,0) 61_5(0,0) 61_6(1.65,0) 61_7(-1.65,-1.65) 61_8(0,-1.65) 61_9(1.65,-1.65)
  rect 0.8x0.8 smd: 62(-7,7) 63(-7,-7) 64(7,-7) 65(7,7)
  Top Layer region: -1.05,1.05 -2.25,1.05 -2.25,1.65 -1.65,2.25 -1.05,2.25
  silkscreen extent -8.35,-7.72 7.72,7.72, body extent -7.7,-7.7 7.7,7.7, height 2.55

## Part data
B1: "Varistors 180pF 560volts 10%", Manufacturer_Name=Bourns, Mouser Part Number=652-MOV-10D561K, Datasheet Link=https://www.bourns.com/docs/Product-Datasheets/MOV10D.pdf, Geometry.Height=15.5mm, Manufacturer_Part_Number=MOV-10D561K, Mouser Price/Stock=https://www.mouser.co.uk/ProductDetail/Bourns/MOV-10D561K?qs=lgttKnAd%252B2ArrqGQgWwr6w%3D%3D
C1 C2 C4 C6 C27 C28 C30: library part C1206X224KARACAUTO, "Multilayer Ceramic Capacitors MLCC - SMD/SMT 100V 0.1uF X7R 1206 5% AEC-Q200", Capacitance=0.1uF, Manufacturer_Name=KEMET, Mouser Part Number=80-C1206X224KARAUTO, Voltage=100V, Datasheet Link=https://search.kemet.com/component-documentation/download/specsheet/C1206X224KARACAUTO, Geometry.Height=1.8mm, Manufacturer_Part_Number=C1206X224KARACAUTO, Mouser Price/Stock=https://www.mouser.co.uk/ProductDetail/KEMET/C1206X224KARACAUTO?qs=zW32dvEIR3ul9TqTUrs40g%3D%3D, Size=1206
C3 C5 C7 C29 C31: library part C1206X224KARACAUTO, "Multilayer Ceramic Capacitors MLCC - SMD/SMT 25V 10uF X7R 1206 10%", Capacitance=10uF, Manufacturer_Name=KEMET, Mouser Part Number=80-C1206X224KARAUTO, Voltage=25V, Datasheet Link=https://search.kemet.com/component-documentation/download/specsheet/C1206X224KARACAUTO, Geometry.Height=1.8mm, Manufacturer_Part_Number=C1206X224KARACAUTO, Mouser Price/Stock=https://www.mouser.co.uk/ProductDetail/KEMET/C1206X224KARACAUTO?qs=zW32dvEIR3ul9TqTUrs40g%3D%3D, Size=1206
C8 C9 C10 C11 C12 C13 C14 C15 C16 C17 C18 C19 C20 C21: library part C1206X224KARACAUTO, "Multilayer Ceramic Capacitors MLCC - SMD/SMT 50V 0.018uF X7R 1206 5%", Capacitance=18nF, Manufacturer_Name=KEMET, Mouser Part Number=80-C1206X224KARAUTO, Voltage=50V, Datasheet Link=https://search.kemet.com/component-documentation/download/specsheet/C1206X224KARACAUTO, Geometry.Height=1.8mm, Manufacturer_Part_Number=C1206X224KARACAUTO, Mouser Price/Stock=https://www.mouser.co.uk/ProductDetail/KEMET/C1206X224KARACAUTO?qs=zW32dvEIR3ul9TqTUrs40g%3D%3D, Size=1206
C22: "SMD Auto X7R Flex, Ceramic, 0.22 uF, 10%, 250 VDC, X7R, SMD, MLCC, FTCAP, Automotive Grade, 1206", Capacitance=0.22uF, Manufacturer_Name=KEMET, Mouser Part Number=80-C1206X224KARAUTO, Voltage=250V, Datasheet Link=https://search.kemet.com/component-documentation/download/specsheet/C1206X224KARACAUTO, Geometry.Height=1.8mm, Manufacturer_Part_Number=C1206X224KARACAUTO, Mouser Price/Stock=https://www.mouser.co.uk/ProductDetail/KEMET/C1206X224KARACAUTO?qs=zW32dvEIR3ul9TqTUrs40g%3D%3D, Size=1206
C23 C24: library part CMP-06035-063441-1, "Chip Multilayer Ceramic Capacitors for General Purpose, 10μF ±10%, X7S(EIA), ±22.0%, 25Vdc, 0805 (2012M)", Capacitance=10uF, Voltage=25V, Size=0805
C25 C26: "ESC, Aluminum, Aluminum Electrolytic, 100 uF, 20%, 35 VDC, -40/+105C, 105C, -40C, 105C, 2,000 Hrs, 12 % , 180 mOhms, 35 uA, 3, 4, 6.3mm, 11mm, Lead Spacing = 2.5mm, 20mm, 10000", Capacitance=100uF, Manufacturer_Name=KEMET, Mouser Part Number=80-ESC107M035AE3AA, Voltage=35V, Datasheet Link=https://content.kemet.com/datasheets/KEM_A4006_ESC.pdf, Geometry.Height=12.5mm, Manufacturer_Part_Number=ESC107M035AE3AA, Mouser Price/Stock=https://www.mouser.co.uk/ProductDetail/KEMET/ESC107M035AE3AA?qs=F5EMLAvA7IA7q%2FLtm4zOMg%3D%3D
F1: library part CMP-26292-000005-1, "FUSE BLOK CARTRIDGE 600V 16A PCB", Ambient Temperature Range High=+85°C, Ambient Temperature Range Low=-40°C, Fuse Current=16A, Manufacturer=Schurter, Package=0, Voltage Rating Ac=500V, Voltage Rating Dc=600V, Automotive=No, Category=Fuse, ComponentLink2Description=Datasheet, ComponentLink2URL=https://www.schurter.com/en/datasheet/typ_OGD.pdf, Conn Orientation=Horizontal, Device Class L1="Circuit Protection", Device Class L2="Fuse Holders", Device Class L3=unset, Digikey Description="FUSE BLOK CARTRIDGE 600V 16A PCB", Height=12.7mm, Lead Free=Yes, Manufacturer Part Number=0031.8231, Mouser Description="Fuse Holder OGD FUSEHOLDER 5X20/6.3X32", Number Of Fuses=1, Octopart=https://octopart.com/0031.8231-schurter-8659, RoHS=TRUE, Standoff Height=0.7mm
J1 J3: "SAMTEC - HTSW-104-07-G-S - , , 2.54 mm, 4 , , HTSW Series, , 1", Manufacturer_Name=SAMTEC, Mouser Part Number=200-HTSW10407GS, Datasheet Link=https://componentsearchengine.com/Datasheets/2/HTSW-104-07-G-S.pdf, Geometry.Height=8.38mm, Manufacturer_Part_Number=HTSW-104-07-G-S, Mouser Price/Stock=https://www.mouser.co.uk/ProductDetail/Samtec/HTSW-104-07-G-S?qs=0lQeLiL1qyYqiS2uxGtRCQ%3D%3D
J2 J5: "Samtec HTSW, 2.54mm Pitch, 3 Way, 1 Row, Vertical Pin Header, Through Hole", Manufacturer_Name=SAMTEC, Mouser Part Number=200-HTSW10307GS, Datasheet Link=http://suddendocs.samtec.com/prints/htsw-xxx-xx-xxx-x-xx-xx-xx-mkt.pdf, Geometry.Height=8.58mm, Manufacturer_Part_Number=HTSW-103-07-G-S, Mouser Price/Stock=https://www.mouser.co.uk/ProductDetail/Samtec/HTSW-103-07-G-S?qs=0lQeLiL1qyYZ%252B%2F6nDbu9tg%3D%3D
J4: "Samtec, HTSW, 2 Way, 1 Row, Vertical Pin Header", Manufacturer_Name=SAMTEC, Mouser Part Number=200-HTSW10207GS, Datasheet Link=http://suddendocs.samtec.com/prints/htsw-xxx-xx-xxx-x-xx-xx-xx-mkt.pdf, Geometry.Height=8.38mm, Manufacturer_Part_Number=HTSW-102-07-G-S, Mouser Price/Stock=https://www.mouser.co.uk/ProductDetail/Samtec/HTSW-102-07-G-S?qs=FESYatJ8odI1BCBanfu%2FIg%3D%3D
J14: library part miniUSB
L1 L2 L3 L4: library part AC1060, "Inductor", Manufacturer_Name="Talema Group LLC", Datasheet Link=https://datasheet.datasheetarchive.com/originals/distributors/Datasheets_SAMA/a09f01302cd5774f4eb110e0a09641df.pdf, Height=38.1mm, Manufacturer_Part_Number=AC1060
PB1 PB2: "Tactile Switches 6.5mm 6.2mm SMD Op Force 1.6N", Manufacturer_Name=Panasonic, Mouser Part Number=667-EVP-BV2C3L000, Datasheet Link=https://media.digikey.com/pdf/Data%20Sheets/Panasonic%20Electronic%20Components/EVP-BV_Type_DS.pdf, Geometry.Height=4.5mm, Manufacturer_Part_Number=EVP-BV2C3L000, Mouser Price/Stock=https://www.mouser.co.uk/ProductDetail/Panasonic/EVP-BV2C3L000?qs=MyNHzdoqoQLjk3IN4ali%252Bg%3D%3D
R1 R2 R55: library part WSL080500000ZEA9, "VISHAY - CRCW201010K0JNEFIF - SMD Chip Resistor, Jumper, 0805 [2012 Metric], 10k, WSL-9 Series, Metal Strip", Manufacturer_Name=Vishay, Mouser Part Number=71-WSL080500000ZEA9, Resistance=10K, Datasheet Link=https://ad.componentsearchengine.com/Datasheets/2/WSL080500000ZEA9.pdf, Geometry.Height=0.838mm, Manufacturer_Part_Number=WSL080500000ZEA9, Mouser Price/Stock=https://www.mouser.co.uk/ProductDetail/Vishay-Dale/WSL080500000ZEA9?qs=f1l5vAGoKgsImKS87N8TmQ%3D%3D, Size=0805
R3 R4 R5 R7 R9 R15 R17 R19 R21 R27 R29 R37 R45 R53 R56 R57: "Thin Film Resistors - SMD 0805 1000ohms 25ppm 0.5% AEC-Q200", Manufacturer_Name=Panasonic, Mouser Part Number=667-ERA-6AED102V, Resistance=1K, Datasheet Link=https://industrial.panasonic.com/cdbs/www-data/pdf/RDM0000/AOA0000C307.pdf, Geometry.Height=0.6mm, Manufacturer_Part_Number=ERA-6AED102V, Mouser Price/Stock=https://www.mouser.co.uk/ProductDetail/Panasonic/ERA-6AED102V?qs=MNPzkKEzRtTAvKH%252BuMqwyg%3D%3D, Size=0805
R6 R8 R14 R16 R18 R20 R26 R28 R54: "VISHAY - WSL080500000ZEA9 - SMD Chip Resistor, Jumper, 0805 [2012 Metric], 0 ohm, WSL-9 Series, Metal Strip", Manufacturer_Name=Vishay, Mouser Part Number=71-WSL080500000ZEA9, Resistance=0R, Datasheet Link=https://ad.componentsearchengine.com/Datasheets/2/WSL080500000ZEA9.pdf, Geometry.Height=0.838mm, Manufacturer_Part_Number=WSL080500000ZEA9, Mouser Price/Stock=https://www.mouser.co.uk/ProductDetail/Vishay-Dale/WSL080500000ZEA9?qs=f1l5vAGoKgsImKS87N8TmQ%3D%3D, Size=0805
R10 R11 R12 R13 R22 R23 R24 R25: library part WSL080500000ZEA9, "Thick Film Resistors - SMD 2.4K OHM 1% 1/2W 100PPM", Manufacturer_Name=Vishay, Mouser Part Number=71-WSL080500000ZEA9, Resistance=2.4K, Datasheet Link=https://ad.componentsearchengine.com/Datasheets/2/WSL080500000ZEA9.pdf, Geometry.Height=0.838mm, Manufacturer_Part_Number=WSL080500000ZEA9, Mouser Price/Stock=https://www.mouser.co.uk/ProductDetail/Vishay-Dale/WSL080500000ZEA9?qs=f1l5vAGoKgsImKS87N8TmQ%3D%3D, Size=0805
R30 R31 R32 R33 R34 R35 R36 R38 R39 R40 R41 R42 R43 R44 R46 R47 R48 R49 R50 R51 R52: "Thin Film Resistors - SMD 1206 240Kohm 0.1% 25ppm", Manufacturer_Name=Panasonic, Mouser Part Number=667-ERA-8AEB244V, Resistance=240K, Datasheet Link=https://componentsearchengine.com/Datasheets/1/ERA-8AEB244V.pdf, Geometry.Height=0.7mm, Manufacturer_Part_Number=ERA-8AEB244V, Mouser Price/Stock=https://www.mouser.com/Search/Refine.aspx?Keyword=667-ERA-8AEB244V, Size=1206
SW1: library part CMP-10038-000023-1, "SWITCH SLIDE SPDT 300MA 6V", Actuator Color=Black, Case/Package=SMD/SMT, Contact Resistance=70mR, Current Rating=300mA, Max Operating Temperature=85°C, Max Voltage Rating (DC)=30V, Min Operating Temperature=-40°C, Package Quantity=4000, Voltage Rating (DC)=6V, Actuator Length=2mm, Actuator Material=Nylon, Actuator Type=Standard, Contact Material="Copper Alloy", Contact Plating=Silver, Depth=7.5mm, Electrical Life=5000Cycles, Housing Material=Nylon, Length=8.5mm, Max Current Rating=300mA, Mount="Surface Mount", Orientation=Straight, Packaging="Tape and Reel", Radiation Hardening=No, RoHS Compliant=Yes, Series=JS, Switch Function=On-On, Switch Travel=2mm, Termination="Gull Wing", Throw Configuration=SPDT
U1: library part CMP-06317-000017-1, "48-TQFP, IND TEMP, 1.8V/3V, TRAY", RoHS Compliant=Yes
U2: "Fast-Transient Response, 7.5-A, Low-Dropout Voltage Regulators with Power Good", Manufacturer_Name="Texas Instruments", Mouser Part Number=595-TPS75933KTTR, Datasheet Link=http://www.ti.com/lit/gpn/tps759, Geometry.Height=4.83mm, Manufacturer_Part_Number=TPS75933KTTR, Mouser Price/Stock=https://www.mouser.co.uk/ProductDetail/Texas-Instruments/TPS75933KTTR?qs=6zVL%252ByCp0mrrB34Pfenz6g%3D%3D
U3: "Hi-Link HLK-20M05 220VAC to 5VDC 20W Step-Down Power Supply Module"
U4: "Bluetooth, WiFi 802.11b/g/n, Bluetooth v5.0 Transceiver Module 2.4GHz Antenna Not Included, U.FL Surface Mount", Package="VFQFN-56 Espressif Systems", Check_prices=https://www.snapeda.com/parts/ESP32-S3-MINI-1U-N8/Espressif+Systems/view-part/?ref=eda, MF="Espressif Systems", MP=ESP32-S3-MINI-1U-N8, SnapEDA_Link=https://www.snapeda.com/parts/ESP32-S3-MINI-1U-N8/Espressif+Systems/view-part/?ref=snap
X1: "Crystals 16.384MHz 10ppm 10pF -20C +70C", Manufacturer_Name=ECS, Mouser Part Number=520-163.84-1030BCKMT, Datasheet Link=https://componentsearchengine.com/Datasheets/1/ECS-163.84-10-30B-CKM-TR.pdf, Geometry.Height=0.85mm, Manufacturer_Part_Number=ECS-163.84-10-30B-CKM-TR, Mouser Price/Stock=https://www.mouser.com/Search/Refine.aspx?Keyword=520-163.84-1030BCKMT

## Via types
v1: diameter 17.72, hole 7.87, Top Layer to Bottom Layer, 20 vias
v2: diameter 50, hole 28, Top Layer to Bottom Layer, 15 vias
v3: diameter 20, hole 12, Top Layer to Bottom Layer, 14 vias
v4: diameter 216.54, hole 196.85, Top Layer to Bottom Layer, 4 vias
v5: diameter 20, hole 15, Top Layer to Bottom Layer, 1 vias

## Nets (pads, with @x,y where several pads share a name; then routed paths per layer and width w, separated by ;. In a path a pad name is that pad's centre, name@x,y a point inside that pad or via, vN(x,y) a via of type N, cw(c..) or ccw(c..) an arc to the next point about the centre after c; other vN are vias at no path point)
+5V: C23.2 C24.2 C25.1 J14.1 R54.1 U2.2 | length 3007.4
  Top Layer w30: U2.2 4102.88,2782.51 C24.2 C23.2 4629.09,2782.51 C25.1 4844.06,2783.43 R54.1 4859.84,2789.37 5275,3204.53 5275,4772.29 5257.43,4789.87 5253.12,4789.87 5224.49,4818.5 J14.1
AVDD33: C1.1 C3.1 C26.1 C27.1 J5.2 R1.2 R55.1 R56.1 R57.1 SW1.1 U1.1 U1.33 U1.34 U1.48 U4.3 | length 5735.5
  Top Layer w10: C27.1 4032.4,5945 4045,5932.4 4077.6,5932.4 4115,5895 4152.01,5895 U4.3 4372.36,5897.36 4395,5920 v2(4400,5920) ; U1.1 4108.27,4268.27 ; U1.48 4126.73,4286.73 4108.27,4268.27 ; 4490,4229.09 4487.91,4229.09 4468.03,4209.21 U1.33 U1.34 4325.65,4228.9 4318.04,4221.29 4267.86,4221.29 4256.57,4210 4166.54,4210 4108.27,4268.27
  Top Layer w30: R55.1 4294.37,3064.37 4320.92,3090.92 C26.1 4434.08,3204.08 4450,3220 J5.2 ; v2(4595,6090) 4720,6090 4772.6,6037.4 R57.1@4835,6037.4
  Bottom Layer w30: C1.1@4485,4229.09 4470.71,4229.09 4461.16,4238.64 4402.56,4297.24 4402.56,4381.14 4353.7,4430 R1.2 4323.7,4433.7 4323.7,4487.43 4341.27,4505 4392.43,4505 4475,4587.57 4475,5040 4200,5315 4200,5720 v2(4400,5920) 4461.41,5981.41 4461.41,6011.41 4540,6090 v2(4595,6090) ; C1.1 C1.1@4487.95,4252.05 ; v1(4490,4250) C1.1@4487.95,4252.05 ; C1.1@4497.72,4240.91 4567.28,4240.91 4580,4228.19 4580,4180 4605,4155 4878.31,4155 SW1.1 4886.73,3411.73 J5.2@4702.5,3227.5 ; C1.1@4497.72,4261.81 C1.1@4487.95,4252.05 ; J5.2@4690,3240 J5.2@4702.5,3227.5 ; J5.2 J5.2@4702.5,3227.5 ; J5.2@4711.15,3215 4702.5,3223.65 J5.2@4702.5,3227.5
BOOT: C28.1 C29.1 PB1.A1 R56.2 U4.4 | length 487.2
  Top Layer w10: PB1.A1 3815.55,5856.26 C29.1 3920.91,5846.81 C28.1 4038.31,5850.91 4045,5857.6 4051.3,5863.9 U4.4
C\S\: J1.4 U1.37 U4.11 | length 1668
  Top Layer w10: 4110.5,5629.65 U4.11 ; 4115,5630 4080,5630 3930,5480 3930,5170 J1.4 4398.93,4688.93 4398.93,4653.93 4343.27,4598.27 U1.37
CF1: J3.1 U1.25 U4.15 | length 2208.4
  Top Layer w10: U4.15 4123.62,5495.79 4117.76,5489.93 4117.76,5274.25 4840.91,4551.11 4840.91,4467.7 4857.16,4451.46 4863.47,4451.46 4869.33,4445.6 4869.33,4186.85 4702.48,4020 J3.1 4432.09,4020 U1.25
CF2: J3.2 U1.26 U4.16 | length 2284.8
  Top Layer w10: U4.16 4195.71,5244.29 4948.07,4491.93 4948.07,4213.07 J3.2 ; U1.26 v1(4490,4071.42)
  Bottom Layer w10: v1(4490,4071.42) 4641.42,3920 J3.2
CF3: J3.3 U1.27 U4.17 | length 2762.1
  Top Layer w10: U4.17 4229.17,5262.8 4985,4506.97 4985,4150 J3.3 ; U1.27 4465.21,4091.1 4476.55,4102.44 v1(4478.64,4102.44)
  Bottom Layer w10: v1(4478.64,4102.44) 4662.56,4102.44 4775,3990 4775,3885 4710,3820 J3.3
CF4: J3.4 U1.28 U4.18 | length 3025.1
  Top Layer w10: U4.18 4262.64,5288.96 5025,4526.6 5025,4035 4710,3720 J3.4 ; U1.28 4445.79,4110.79 4461.3,4126.3 v1(4570,4126.3)
  Bottom Layer w10: v1(4570,4126.3) 4665.34,4126.3 4795,3996.64 4795,3860 J3.4
EN: C30.1 C31.1 PB2.A1 R57.2 U4.45 | length 496.9
  Top Layer w10: U4.45 4833.31,5964.29 4835,5962.6 C31.1@4835,5857.52 ; C31.1@4828.19,5850.71 4828.19,5845.35 4830,5843.54 C30.1 4830,5635.55 PB2.A1 ; C31.1@4830,5850.71 4835,5855.71 C31.1@4835,5857.52 ; C31.1@4834.09,5856.62 C31.1@4835,5857.52 ; C31.1@4848.38,5870.91 C31.1@4835,5857.52
GND: C1.2 C2.1 C3.2 C4.2 C5.2 C6.2 C7.2 C8.2 C9.2 C10.2 C11.2 C12.2 C13.1 C14.1 C15.2 C16.2 C17.1 C18.1 C20.2 C21.2 C23.1 C24.1 C25.2 C26.2 C27.2 C28.2 C29.2 C30.2 C31.2 J5.3 J14.5 PB1.B1 PB2.B1 R3.2 R4.2 R5.2 R10.2 R11.2 R12.1 R13.1 R22.2 R23.2 R24.1 R25.1 R37.2 R45.2 R53.2 SW1.3 TP3.1 U1.2 U1.12 U1.19 U1.32 U1.44 U1.47 U2.1 U2.3 U2.6 U3.3 X1.2 X1.4 | length 6686.6
  Top Layer w10: PB1.B1 3863.54,6013.74 3906.61,6056.81 v2(3920,6056.81) ; v3(3870,4475) 3870,4385 4006.42,4248.58 U1.2 ; v3(3995,3990) 4015,4010 4015,4020.71 4046.02,4051.73 U1.12 ; C5.2 4118.19,4406.61 4146.42,4378.38 U1.47 ; U1.19 4244.84,3953.83 4283.09,3915.59 4283.09,3911.91 v3(4285,3910) ; U1.32 4511.82,4189.53 4522.29,4200 v3(4525,4200)
  Top Layer w30: v1(2935,5116.85) 3024.92,5116.85 R45.2 ; v1(2960.7,3750.91) 3065.87,3750.91 v1(3080,3736.77) ; R10.2 3124.72,5609.37 C12.2 v1(3144.09,5690) 3075.63,5690 R12.1 ; R23.2 3105,1789.37 R25.1 3194.37,1784.37 C18.1 v1(3200,1880) ; R13.1 R11.2 3145.35,3023.74 C11.2 3199.09,3070 C14.1 ; R24.1 3184.72,4384.37 v1(3229.09,4340) ; R22.2 3199.37,4480.63 v1(3230,4450) ; U2.6 3790,2745 3925,2745 ; U3.3 4453.94,2278.94 4630,2455 C25.2 4597.51,2717.49 v1(4390,2717.49) v1(4260,2717.49) 4256.35,2721.14 U2.1 4092.64,2716.46 4029.28,2716.46 4027.82,2715 3955,2715 3925,2745 ; R5.2 3934.96,3818.23 v2(3965,3788.19) 4062.56,3788.19 R4.2 4178.46,3815.63 4210,3784.1 4310,3784.1 ; U2.3 3995,2855 3930,2790 3930,2750 3925,2745
  Top Layer w40: C29.2 3827.05,5737.05 3922.95,5737.05 v2(3923.98,5738.07) C28.2 ; v2(4113.19,4515) 4115.69,4512.5 4115.69,4422.5 C5.2 ; PB2.B1 4906.26,5466.26 4940.9,5500.9 v2(4940.9,5839.1) C31.2
  Bottom Layer w10: v2(4113.19,4515) 4168.19,4570 4259.14,4570 4282.43,4546.72 4282.43,4406.19 4305.71,4382.9 4305.71,4345.2 C2.1 ; v3(4800,4400) 4800.63,4400 4857.2,4343.43 SW1.3
  Bottom Layer w40: C1.2@4480,4355.91 C3.2
  other v1: 3095,2310.63 3205,3085 4360,3740 4355,3779.1
  other v2: 4488.52,4361.91
  other v4: 1010,180
IRQ0: J4.2 U1.30 U4.19 | length 1756.7
  Top Layer w10: v3(4295,5330) 4295.55,5330.55 4295.55,5453.9 U4.19 ; U1.30 4448.27,4150.16 4448.43,4150 4546.72,4150 4546.87,4150.16 4645.16,4150.16 J4.2
  Bottom Layer w10: v3(4295,5330) 4295,5305 4565,5035 4565,4510 4645,4430 4645,4300 J4.2
IRQ1: J4.1 U1.31 U4.20 | length 1678.9
  Top Layer w10: v3(4325,5370) 4325,5372.71 4329.57,5377.27 U4.20 ; U1.31 4545.75,4169.84 4655.91,4280 4675,4280 J4.1
  Bottom Layer w10: v3(4325,5370) 4325.18,5369.82 4325.18,5319.82 4605,5040 4605,4535 4695,4445 4695,4350 J4.1
NetB1_2: B1.2 C22.2 F1.2 U3.1 | length 2087.9
  Top Layer w10: F1.2@2428.7,311.57 2428.7,508.43 3146.61,508.43 B1.2 3310,659.68 C22.2 3679.8,669.09 U3.1
NetC2_2: C2.2 R1.1 U1.41 | length 278
  Top Layer w10: U1.41 4264.53,4280.22 4272.64,4272.11 v2(4272.64,4261.29)
  Bottom Layer w10: R1.1 4237.31,4426.05 4237.31,4392.31 4217.72,4372.72 4217.72,4299.54 4218.58,4291.42 4223.58,4286.42 v2(4272.64,4261.29)
NetC4_1: C4.1 C5.1 U1.42 U1.43 | length 213.4
  Top Layer w10: C4.1 4225,4425 C5.1 4225.16,4415.16 U1.43 U1.42
NetC6_1: C6.1 C7.1 U1.11 | length 360
  Top Layer w10: v2(3940,4040) 3971.42,4071.42 U1.11
  Bottom Layer w10: C6.1 3755,4100.91 3878.39,4100.91 3911.01,4068.28 3911.72,4068.28 v2(3940,4040)
NetC8_1: C8.1 R3.1 U1.18 | length 296.7
  Top Layer w10: U1.18 4225.16,3952.3 4238.58,3938.88 4238.58,3921.06 4274.64,3885 4345,3885 4355,3895 4430,3895 R3.1@4435,3890
NetC9_1: C9.1 R4.1 U1.16 | length 322.3
  Top Layer w10: U1.16 4185.79,3920.12 4205,3900.91 C9.1@4188.9,3884.8 ; C9.1@4188.9,3884.8 4090,3884.8 C9.1@4188.9,3884.8
NetC10_1: C10.1 R5.1 U1.14 | length 365.9
  Top Layer w10: R5.1@3850,3895 3855,3900 C10.1 3980,3915 4035,3915 4055,3935 4135,3935 4146.42,3946.42 U1.14
NetC11_1: C11.1 R9.1 U1.8 | length 1772.9
  Top Layer w10: C11.1@3290,2949.09 3305,2964.09 3321.15,2980.24 3345.24,2980.24 3365,3000 3365,3185 3680,3500 3680,3930 3880.47,4130.47 U1.8
  Top Layer w30: R9.1@3290,2835 3305,2850 3305,2964.09 C11.1
NetC12_1: C12.1 R7.1 U1.4 | length 1802
  Top Layer w10: R7.1@3242.4,5470 3275,5470 3563.24,5181.76 3563.24,4621.76 3975,4210 U1.4@4068.86,4210 ; C12.1@3242.4,5576.5 C12.1
  Top Layer w30: R7.1@3242.4,5470 C12.1@3242.4,5576.5
NetC13_2: C13.2 R15.1 U1.3 | length 2001.8
  Top Layer w10: C13.2@3261.72,5695.82 C13.2 3271.15,5674.76 3290.24,5674.76 3320,5645 3320,5470 3595,5195 3595,4620 3985.2,4229.8 4068.74,4229.8 U1.3
  Top Layer w30: R15.1@3235,5820 3255,5800 3255,5713.58 3261.72,5706.86 C13.2@3261.72,5695.82
NetC14_2: C14.2 R17.1 U1.7 | length 1534
  Top Layer w10: C14.2 3315.91,3188.9 3304.8,3200 3316.39,3211.58 3346.58,3211.58 3650,3515 3650,3935 3865.16,4150.16 U1.7
NetC15_1: C15.1 R21.1 U1.5 | length 958.6
  Top Layer w10: R21.1@3334.8,4570 R21.1@3341.81,4562.99 ; C15.1 3690,4450 3950.47,4189.53 U1.5
  Top Layer w30: C15.1 R21.1@3341.81,4562.99
NetC16_1: C16.1 R19.2 U1.9 | length 2677.5
  Top Layer w10: R19.2@3282.4,2010 3315,2010 3390,2085 3390,3155 3709.52,3474.52 3709.52,3924.52 3895.79,4110.79 U1.9
  Top Layer w30: R19.2@3282.4,2010 3282.4,1926.89 3305.91,1903.39 C16.1
NetC17_2: C17.2 R27.1 U1.6 | length 974.3
  Top Layer w10: R27.1@3332.4,4225 R27.1@3340.91,4233.5 ; C17.2 3341.15,4340.24 3375.24,4340.24 3455,4420 3685,4420 3935,4170 U1.6@4060,4170
  Top Layer w30: R27.1@3340.91,4233.5 C17.2
NetC18_2: C18.2 R29.2 U1.10 | length 2859.5
  Top Layer w10: C18.2 3352.01,1790 3425,1862.99 3425,3145 3735,3455 3735,3911.57 3914.53,4091.1 U1.10
  Top Layer w30: R29.2@3287.4,1670 3287.4,1752.2 3311.81,1776.61 C18.2
NetC19_1: C19.1 R36.1 R37.1 U1.13 | length 2563.3
  Top Layer w10: 3030,2387.4 3035,2382.4 ; R37.1@3090,2382.4 3095,2387.4 3100,2382.4 3222.4,2382.4 v2(3300,2460) ; v2(3465,2585) 3460,2580 3460,2585 3460,3135 3765,3440 3765,3910 3800,3945 4006.21,3945 4055.86,3994.65 U1.13
  Top Layer w30: R36.1 2860.47,2402.48 2972.25,2402.48 2984.03,2390.71 3026.69,2390.71 3030,2387.4 ; 3035,2382.4 R37.1@3090,2382.4
  Bottom Layer w10: v2(3300,2460) 3334.74,2494.74 3369.74,2494.74 3460,2585 v2(3465,2585)
NetC20_1: C20.1 R44.1 R45.1 U1.15 | length 2046
  Top Layer w10: R44.1@2815,5001.89 R44.1@2818.15,5005.04 ; R45.1@3055.87,5009.13 R45.1@3065,5000 ; v3(4130.21,4186.38) 4130.21,4151.43 4126.14,4147.36 4126.14,4078.86 4166.1,4038.9 U1.15
  Top Layer w30: R44.1@2818.15,5005.04 C20.1 3057.36,5005.04 3057.36,4997.5 3062.5,4992.36 3062.5,4912.5 v2(3060,4910)
  Bottom Layer w10: v2(3060,4910) 3395,4910 3761.54,4543.46 3761.54,4353.46 3928.62,4186.38 v3(4130.21,4186.38)
NetC21_1: C21.1 R52.1 R53.1 U1.17 | length 1700
  Top Layer w10: C21.1 C21.1@2966.61,3645 ; R53.1@3065,3645 3084.09,3664.09 3143.5,3664.09 3145,3662.6 v2(3275,3662.6) ; v1(4150,4125) 4150,4090 4205.47,4034.53 U1.17
  Top Layer w30: R52.1@2858.58,3639.09 C21.1 ; C21.1@2966.61,3645 2995.91,3645 R53.1@3065,3645
  Bottom Layer w10: v2(3275,3662.6) 3387.32,3774.92 3874.92,3774.92 4110,4010 4110,4100 4122.09,4112.09 4135.01,4112.09 4147.91,4125 v1(4150,4125)
NetJ5_1: J5.1 TP1.1 U2.4 | length 721.6
  Top Layer w30: U2.4 4313.07,2921.93 TP1.1 4527.48,2905 4695,3072.52 J5.1
NetL1_1: L1.1 R6.2 | length 437.3
  Top Layer w30: L1.1 2674.61,5480 2767.32,5572.72 2794.61,5600 2920.63,5600 R6.2
NetL1_3: L1.3 R14.2 | length 1783.7
  Top Layer w30: L1.3 1375.39,5480 1470.09,5574.69 1570.39,5675 2888.9,5675 2925.16,5711.26 R14.2
NetL2_1: L2.1 R8.2 | length 560.2
  Top Layer w30: L2.1 2748.49,2803.49 2800,2855 ; 2805,2860 2971.74,3026.74 3017.37,3026.74 R8.2
NetL2_3: L2.3 R16.2 | length 1894
  Top Layer w30: L2.3 1449.28,2803.49 1736.42,3090.63 3015,3090.63 R16.2
NetL3_1: L3.1 R26.2 | length 572.2
  Top Layer w30: L3.1 2772.53,4141.75 3010.16,4379.37 R26.2
NetL3_3: L3.3 R20.2 | length 1906.3
  Top Layer w30: L3.3 1482.53,4141.75 1690.79,4350 2879.53,4350 3005.16,4475.63 R20.2
NetL4_1: L4.1 R18.2 | length 1862.5
  Top Layer w30: L4.1 1435.39,2020 2800,2020 2938.74,1881.26 R18.2
NetL4_3: L4.3 R28.2 | length 471.7
  Top Layer w30: L4.3 2640.24,1774.37 R28.2
NetR2_1: R2.1 SW1.2 | length 337.5
  Bottom Layer w10: v1(4880,4490) 5103.27,4266.73 SW1.2
NetR2_2: R2.2 U1.36 | length 492.8
  Top Layer w10: U1.36 4553.27,4268.27 4773.42,4488.42 4799.68,4488.42 R2.2
NetR6_1: R6.1 R7.2 R10.1 | length 262.7
  Top Layer w30: R6.1 3059.84,5530.63 3120.47,5470 R7.2@3167.6,5470
NetR8_1: R8.1 R9.2 R11.1 | length 248.8
  Top Layer w10: R11.1@3109.37,2950.63 R11.1 ; R9.2@3215.2,2835 R9.2@3215.2,2844.8
  Top Layer w30: R8.1 R11.1@3109.37,2950.63 ; R11.1 R9.2@3215.2,2844.8
NetR12_2: R12.2 R14.1 R15.2 | length 242.3
  Top Layer w10: R12.2@3054.37,5790 R12.2 3084.37,5789.37 ; R15.2@3155.2,5825 R15.2@3160.2,5820
  Top Layer w30: R14.1 R12.2@3054.37,5790 ; 3084.37,5789.37 3120,5825 R15.2@3155.2,5825
NetR13_2: R13.2 R16.1 R17.2 | length 224.1
  Top Layer w10: R13.2@3114.37,3174.37 R13.2
  Top Layer w30: R16.1 R13.2@3114.37,3174.37 ; R13.2 3124.84,3173.74 3128.54,3177.44 3128.54,3182.43 3146.12,3200 R17.2@3230,3200
NetR18_1: R18.1 R19.1 R23.1 | length 233.5
  Top Layer w10: R23.1@3098.74,1960 R23.1
  Top Layer w30: R18.1 R23.1@3098.74,1960 ; R23.1 3151.34,1953.74 R19.1@3207.6,2010
NetR20_1: R20.1 R21.2 R22.1 | length 251.5
  Top Layer w30: R20.1 3129.37,4554.37 3134.37,4559.37 3144.84,4559.37 3155.47,4570 R21.2@3260,4570
NetR24_2: R24.2 R26.1 R27.2 | length 278.8
  Top Layer w10: R24.2@3125,4300.63 R24.2
  Top Layer w30: R26.1 R24.2@3125,4300.63 ; R24.2 3139.84,4305.63 3143.54,4301.93 3143.54,4292.09 3209.66,4225.97 3256.62,4225.97 R27.2@3257.6,4225
NetR25_2: R25.2 R28.1 R29.1 | length 226.5
  Top Layer w10: R28.1 R28.1@3015,1705.63
  Top Layer w30: R28.1@3015,1705.63 R25.2 3135.63,1670 R29.1@3212.6,1670
NetR30_1: R30.1 R31.2 | length 137.5
  Top Layer w10: R30.1 R30.1@2205.95,2409.06 ; R31.2 R31.2@2335,2409.06
  Top Layer w30: R30.1@2205.95,2409.06 R31.2
NetR31_1: R31.1 R32.2 | length 97.1
  Top Layer w10: R31.1@2335,2290.94 R31.1@2340,2285.94
  Top Layer w30: R31.1@2340,2285.94 R32.2@2430,2285.94
NetR32_1: R32.1 R33.2 | length 105
  Top Layer w30: R32.1@2430,2404.06 R33.2@2535,2404.06
NetR33_1: R33.1 R34.2 | length 95
  Top Layer w30: R33.1@2535,2285.94 R34.2@2630,2285.94
NetR34_1: R34.1 R35.2 | length 90
  Top Layer w30: R34.1@2630,2404.06 R35.2@2720,2404.06
NetR35_1: R35.1 R36.2 | length 138.9
  Top Layer w10: R35.1@2720,2285.94 R35.1
  Top Layer w30: R35.1 R36.2
NetR38_1: R38.1 R39.2 | length 124.9
  Top Layer w10: R38.1@2195,5001.89 R38.1@2212.64,4984.25
  Top Layer w30: R38.1 R39.2
NetR39_1: R39.1 R40.2 | length 105.9
  Top Layer w30: R39.1@2299.04,5120 R40.2
NetR40_1: R40.1 R41.2 | length 105
  Top Layer w30: R40.1 R41.2
NetR41_1: R41.1 R42.2 | length 105
  Top Layer w30: R41.1 R42.2
NetR42_1: R42.1 R43.2 | length 107.1
  Top Layer w10: R43.2@2700,4995 R43.2@2705,4990
  Top Layer w30: R42.1@2600,4995 R43.2@2700,4995
NetR43_1: R43.1 R44.2 | length 105
  Top Layer w30: R43.1 R44.2
NetR46_1: R46.1 R47.2 | length 105.4
  Top Layer w10: R46.1 R46.1@2200.94,3635
  Top Layer w30: R46.1@2200.94,3635 R47.2@2305,3635
NetR47_1: R47.1 R48.2 | length 107.9
  Top Layer w30: R47.1 R48.2
NetR48_1: R48.1 R49.2 | length 117.5
  Top Layer w30: R48.1 R49.2@2533.34,3635.95
NetR49_1: R49.1 R50.2 | length 115
  Top Layer w30: R49.1@2532.72,3760 R50.2@2647.72,3760
NetR50_1: R50.1 R51.2 | length 110.9
  Top Layer w30: R50.1 R51.2@2742.69,3635.95
NetR51_1: R51.1 R52.2 | length 123.6
  Top Layer w30: R51.1 2789.05,3754.05 2788.11,3755 R52.2@2861.05,3755
NetR54_2: R54.2 TP2.1 U3.4 | length 549.3
  Top Layer w30: U3.4 4950,2442.44 TP2.1 4935.63,2625 R54.2
NetR55_2: R55.2 U2.5 | length 124
  Top Layer w10: U2.5 4216.77,2988.86 R55.2
NetU1_20: U1.20 X1.3 | length 513
  Top Layer w10: v3(4205,4080) 4241.91,4043.09 4245.98,4043.09 4263.62,4025.44 4263.62,3995.55 U1.20
  Bottom Layer w10: v3(4205,4080) 4206.91,4078.09 4206.91,4059.37 4216.29,4050 4216.29,4021.29 4210,4015 4210,3770 4245,3735 4254.33,3744.33 X1.3@4275,3744.33
NetU1_21: U1.21 X1.1 | length 503
  Top Layer w10: v3(4205,4145) 4205,4118.39 4284.21,4039.17 U1.21
  Bottom Layer w10: v3(4205,4145) 4361.62,3988.38 X1.1@4361.62,3890
SCLK: J1.3 U1.38 U4.8 | length 2057.9
  Top Layer w10: v2(4050,4635.73) 4020,4665.73 4020,4910 3825,5105 3825,5510 4045.04,5730.04 U4.8 ; J1.3 4305,4680.24 4323.58,4661.66 U1.38
  Bottom Layer w10: v2(4050,4635.73) 4057.65,4628.07 4086.93,4628.07 4095,4620 4230,4620 J1.3
SDI: J1.1 U1.40 U4.9 | length 1768.2
  Top Layer w10: U4.9 4057.79,5696.57 3865,5503.79 3865,5120 4105,4880 J1.1 4105,4665 4135,4635 4215,4635 4284.21,4565.79 U1.40
SDO: J1.2 U1.39 U4.10 | length 1663.9
  Top Layer w10: U4.10 4063.11,5663.11 3900,5500 3900,5145 4205,4840 J1.2 4303.9,4596.1 U1.39
USB_N: J14.2 U4.23 | length 958.8
  Top Layer w15: U4.23 4429.96,5374.68 4729.64,5075 4945,5075 5064.86,4955.14 5084.72,4955.14 5093.5,4946.35 5093.5,4924.49 J14.2
USB_P: J14.3 U4.24 | length 1044.2
  Top Layer w15: U4.24 4463.43,5446.57 4454.96,5438.11 4454.96,5385.04 4740,5100 4955.36,5100 5075.22,4980.14 5105.64,4980.14 5156.16,4929.62 5156.16,4915.45 5190.11,4881.5 J14.3
Va: F1.1 J6.1 J7.1 R30.2 | length 462.9
  Top Layer w39.37: J7.1 2176.67,2308.33 R30.2 ; J7.1@1780,2315 J7.1@1800,2335
Vb: J8.1 J9.1 R38.2 | length 894.4
  Top Layer w10: R38.2@2184.17,5120 R38.2@2195,5120
  Top Layer w30: J8.1@1340,5025 2089.17,5025 R38.2@2184.17,5120
Vc: J10.1 J11.1 R46.2 | length 907.4
  Top Layer w10: J10.1@1315,3700 1790,3700 J11.1@1844.06,3754.06
  Top Layer w30: J11.1@1844.06,3754.06 R46.2
Vn: B1.1 C22.1 J12.1 J13.1 U3.2 | length 479.9
  Top Layer w10: J12.1 1760,950 J13.1@1775,935 ; C22.1@3293.27,797.64 C22.1
ZX0: J2.3 U1.22 U4.12 | length 2778.7
  Top Layer w10: v5(4065,5570) 4091.18,5596.18 U4.12 ; J2.3 4270,3460 4330,3520 4330,3640 4535,3845 4535,3890 4490,3935 4321.04,3935 4303.9,3952.14 4303.9,4086.1 v3(4285,4105)
  Bottom Layer w10: v5(4065,5570) 3980,5485 3980,5287.89 3954.38,5262.27 3954.38,4395.62 4076.54,4273.46 4116.54,4273.46 v3(4285,4105)
ZX1: J2.2 U1.23 U4.13 | length 2703.4
  Top Layer w10: v3(4080,5540) 4102.72,5562.72 U4.13 ; v1(4305,4145) 4323.58,4126.42 U1.23 ; U1.23@4324.49,3994.65 4324.49,3965.38 4325,3964.87 4325,3955.86 4330.86,3950 4510,3950 4520,3940 4555,3905 4555,3840 4360,3645 4360,3420 J2.2
  Bottom Layer w10: v3(4080,5540) 3995,5455 3995,5255 3980,5240 3980,4435 4270,4145 v1(4305,4145)
ZX2: J2.1 U1.24 U4.14 | length 2681.8
  Top Layer w10: v3(4110,5518.34) 4120.91,5529.25 U4.14 ; v3(4325,4195) 4343.27,4176.73 4343.27,3985.91 4344.17,3985 4500,3985 4575,3910 4575,3830 4385,3640 4385,3525 4458.38,3451.62 4458.38,3421.62 J2.1
  Bottom Layer w10: v3(4110,5518.34) 4110,5517.48 4010,5417.48 4010,4435 4250,4195 v3(4325,4195)
pads on no net: C19.2 J14.4 J14.10 J14.11 L1.2 L2.2 L3.2 L4.2 PB1.A2 PB1.B2 PB2.A2 PB2.B2 U1.29 U1.35 U1.45 U1.46 U4.1 U4.2 U4.5 U4.6 U4.7 U4.21 U4.22 U4.25 U4.26 U4.27 U4.28 U4.29 U4.30 U4.31 U4.32 U4.33 U4.34 U4.35 U4.36 U4.37 U4.38 U4.39 U4.40 U4.41 U4.42 U4.43 U4.44 U4.46 U4.47 U4.48 U4.49 U4.50 U4.51 U4.52 U4.53 U4.54 U4.55 U4.56 U4.57 U4.58 U4.59 U4.60 U4.61_1 U4.61_2 U4.61_3 U4.61_4 U4.61_5 U4.61_6 U4.61_7 U4.61_8 U4.61_9 U4.62 U4.63 U4.64 U4.65
copper on no net:
  other v4: 5185,155 5185,6000 1020,6010

## Polygon pours and split planes (outlines as drawn)
Vc on Top Layer "VC_L01_P002" (solid, pour order 2): 2010,3895 2015,3890 2015,3435 1100,3435 1090,3445 1090,3895
Vn on Top Layer "VN_L01_P005" (solid, pour order 5): 2090,1175 2237.5,897.5 4257.5,897.5 4550,605 4550,180 4321.53,180 4321.53,549.39 4123.8,735 3165,735 1960,735 1960,1175
NetB1_2 on Top Layer "NETB1_2_L01_P006" (solid, pour order 6): 2345,600 2345,170 4195,170 4220,195 4210,205 4210,505 4205,505 4020,690 2390,690
Vn on Top Layer "VN_L01_P001" (solid, pour order 1): 1095,1180 1095,730 1102.5,727.5 1230,725 2005,725 2005,1165 1990,1180
Va on Top Layer "VA_L01_P004" (solid, pour order 4): 1190,2370 1190,2275 1190,2105 1060,2005 1055,2005 1045,725 1131.39,644.78 1268.75,640 1705,640 1705,575 1705,220.17 1012.03,215.53 980,260.17 980,2475 985,2475 1040,2530 1179.33,2530
Vb on Top Layer "VB_L01_P003" (solid, pour order 3): 1090,4800 1150,4800 1215,4800 2005,4800 2005,5250 2000,5255 1090,5255
Va on Top Layer "VA_L01_P000" (solid, pour order 0): 1105,2525 1110,2530 1995,2530 1995,2085 1105,2085
GND on GND1 (split plane): 5309.9,20.1 900.1,20.1 900.1,6124.9 5309.9,6124.9
GND on Layer GND2 (split plane): 5309.9,20.1 900.1,20.1 900.1,6124.9 5309.9,6124.9